# EAGLE board SparkFun_Ambient_Light_Sensor_VEML6030-Panel (EAGLE 9.4.0), part 1 of 4
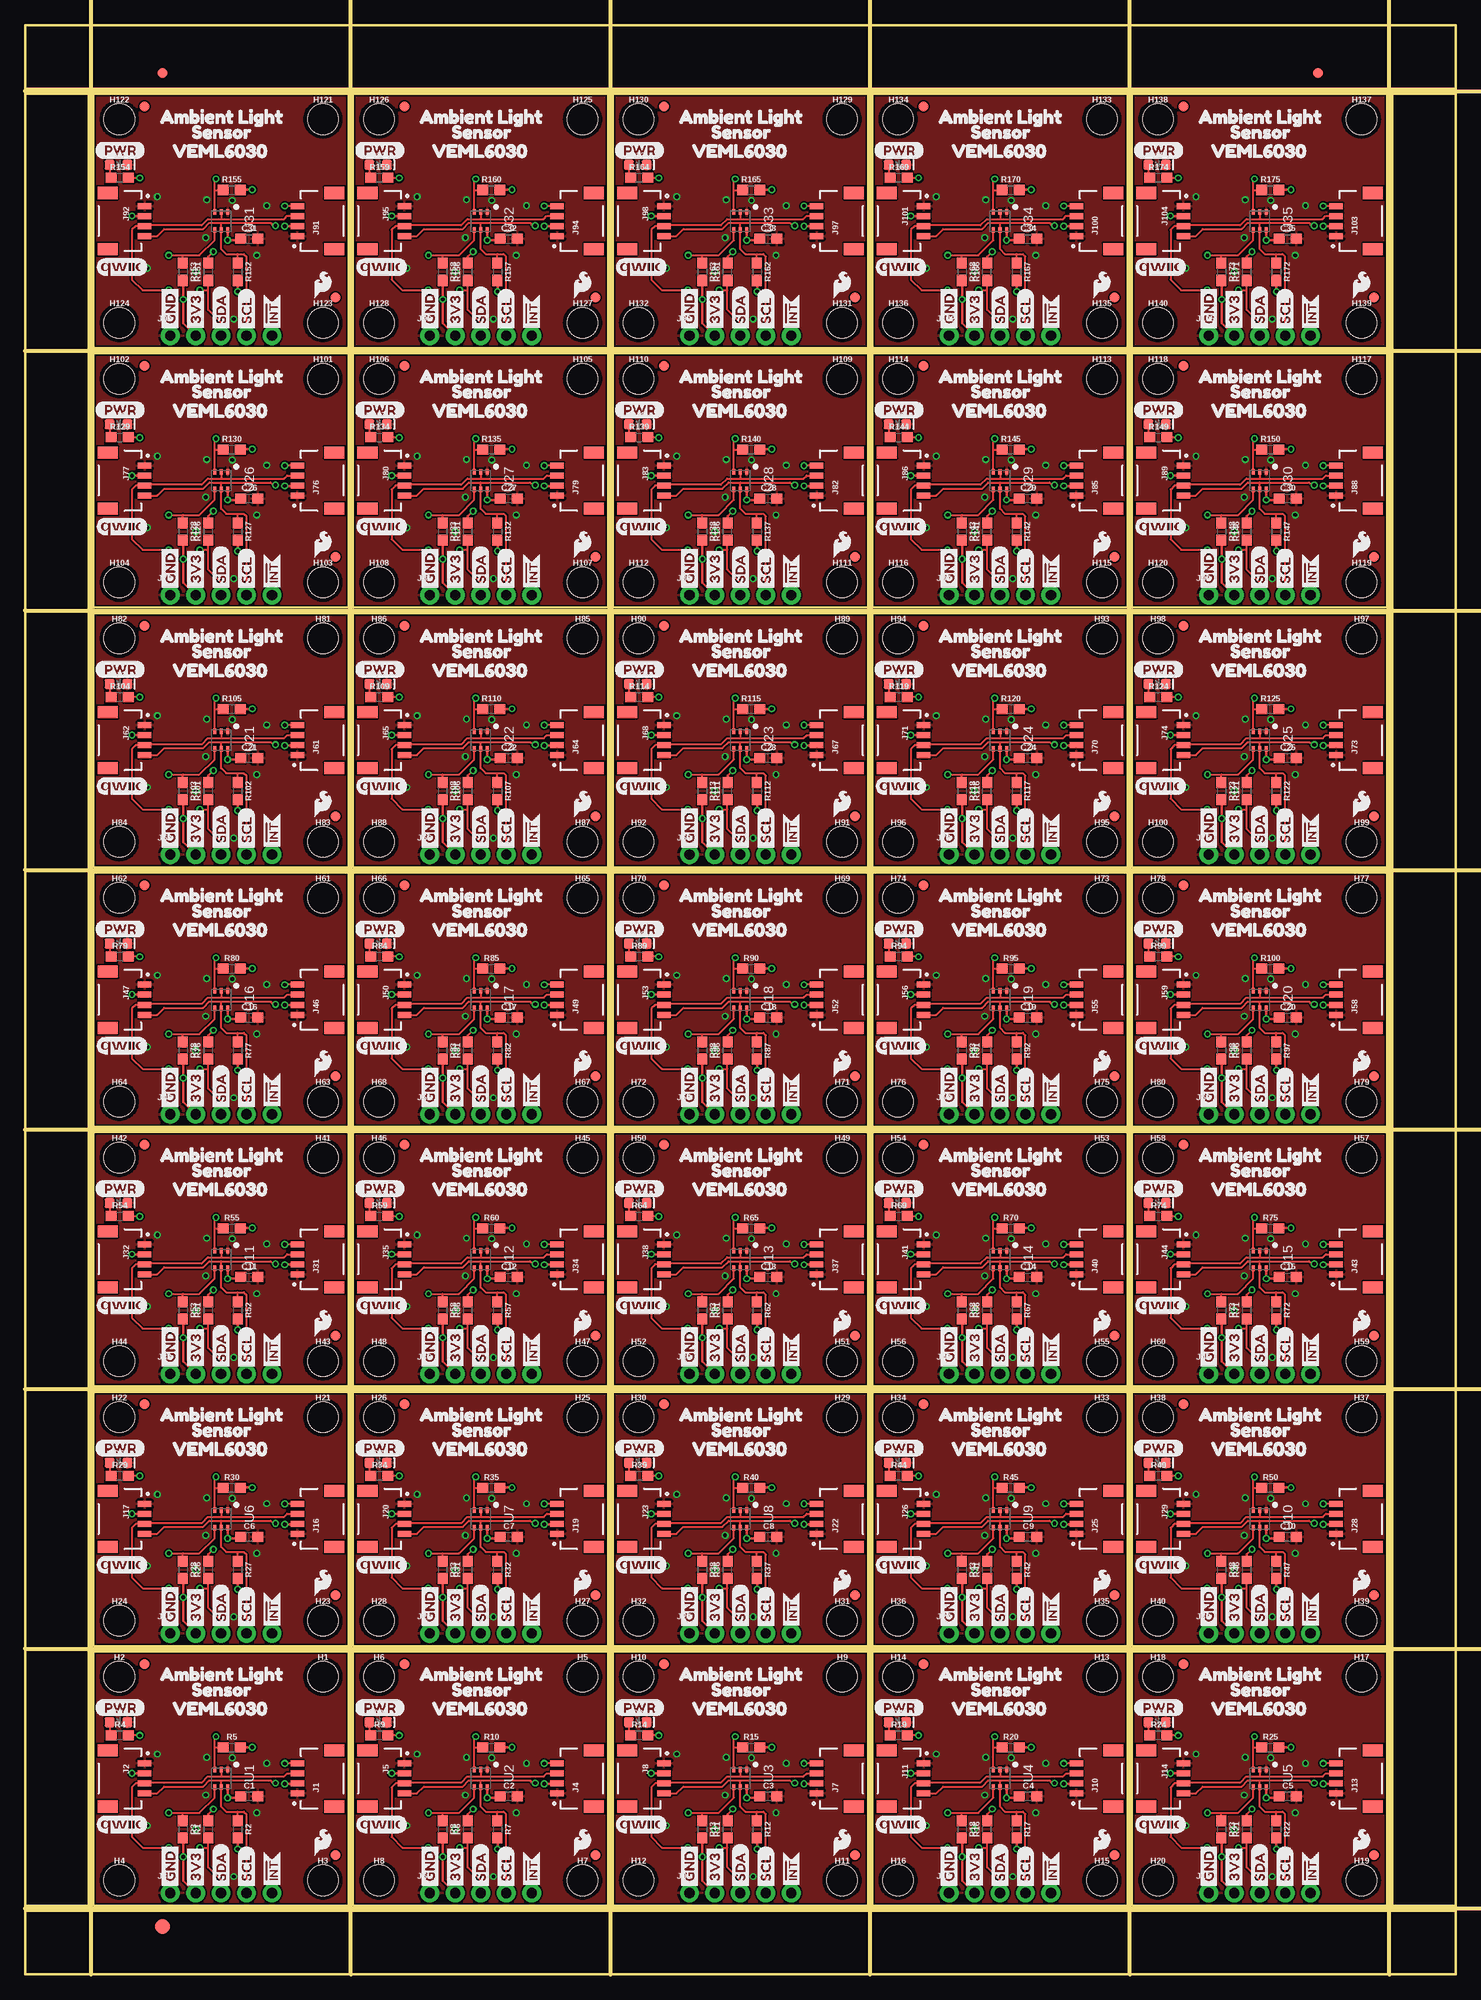
[diagram p0: board, top side]
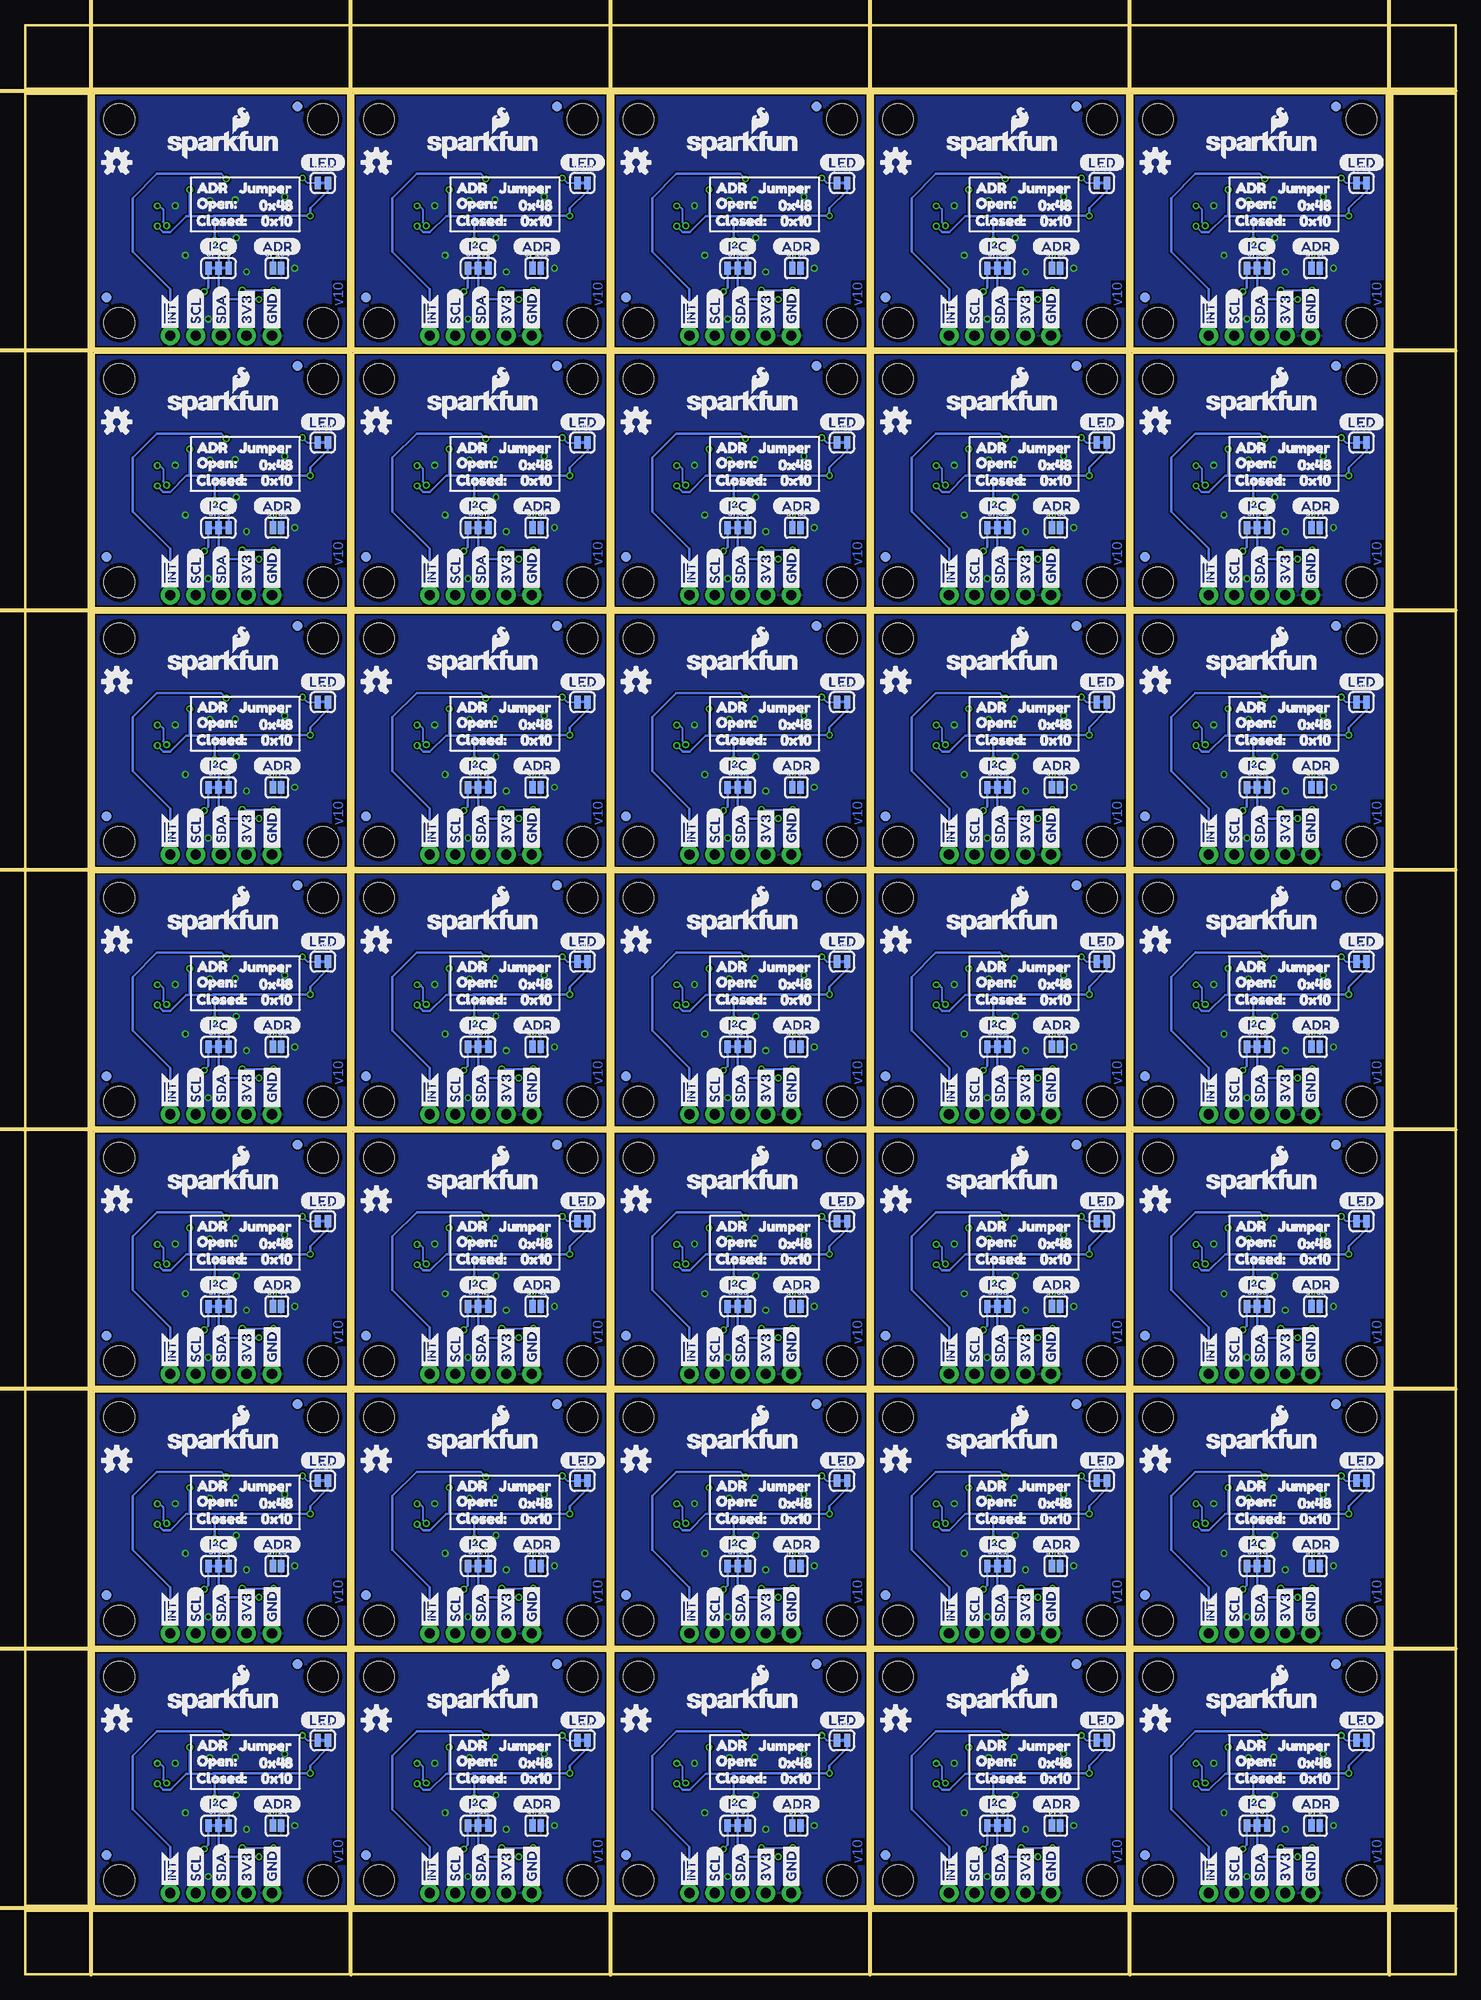
[diagram p1: board, bottom side, seen from below]

Size 142.75 x 194.56 mm. Coordinates in mm from the lower left corner, seen from the top.
Outline: 6.86,6.86 6.86,32.26 32.26,32.26 32.26,6.86 6.86,6.86
Outline: 32.77,6.86 32.77,32.26 58.17,32.26 58.17,6.86 32.77,6.86
Outline: 58.67,6.86 58.67,32.26 84.07,32.26 84.07,6.86 58.67,6.86
Outline: 84.58,6.86 84.58,32.26 109.98,32.26 109.98,6.86 84.58,6.86
Outline: 110.49,6.86 110.49,32.26 135.89,32.26 135.89,6.86 110.49,6.86
Outline: 6.86,32.77 6.86,58.17 32.26,58.17 32.26,32.77 6.86,32.77
Outline: 32.77,32.77 32.77,58.17 58.17,58.17 58.17,32.77 32.77,32.77
Outline: 58.67,32.77 58.67,58.17 84.07,58.17 84.07,32.77 58.67,32.77
Outline: 84.58,32.77 84.58,58.17 109.98,58.17 109.98,32.77 84.58,32.77
Outline: 110.49,32.77 110.49,58.17 135.89,58.17 135.89,32.77 110.49,32.77
Outline: 6.86,58.67 6.86,84.07 32.26,84.07 32.26,58.67 6.86,58.67
Outline: 32.77,58.67 32.77,84.07 58.17,84.07 58.17,58.67 32.77,58.67
Outline: 58.67,58.67 58.67,84.07 84.07,84.07 84.07,58.67 58.67,58.67
Outline: 84.58,58.67 84.58,84.07 109.98,84.07 109.98,58.67 84.58,58.67
Outline: 110.49,58.67 110.49,84.07 135.89,84.07 135.89,58.67 110.49,58.67
Outline: 6.86,84.58 6.86,109.98 32.26,109.98 32.26,84.58 6.86,84.58
Outline: 32.77,84.58 32.77,109.98 58.17,109.98 58.17,84.58 32.77,84.58
Outline: 58.67,84.58 58.67,109.98 84.07,109.98 84.07,84.58 58.67,84.58
Outline: 84.58,84.58 84.58,109.98 109.98,109.98 109.98,84.58 84.58,84.58
Outline: 110.49,84.58 110.49,109.98 135.89,109.98 135.89,84.58 110.49,84.58
Outline: 6.86,110.49 6.86,135.89 32.26,135.89 32.26,110.49 6.86,110.49
Outline: 32.77,110.49 32.77,135.89 58.17,135.89 58.17,110.49 32.77,110.49
Outline: 58.67,110.49 58.67,135.89 84.07,135.89 84.07,110.49 58.67,110.49
Outline: 84.58,110.49 84.58,135.89 109.98,135.89 109.98,110.49 84.58,110.49
Outline: 110.49,110.49 110.49,135.89 135.89,135.89 135.89,110.49 110.49,110.49
Outline: 6.86,136.4 6.86,161.8 32.26,161.8 32.26,136.4 6.86,136.4
Outline: 32.77,136.4 32.77,161.8 58.17,161.8 58.17,136.4 32.77,136.4
Outline: 58.67,136.4 58.67,161.8 84.07,161.8 84.07,136.4 58.67,136.4
Outline: 84.58,136.4 84.58,161.8 109.98,161.8 109.98,136.4 84.58,136.4
Outline: 110.49,136.4 110.49,161.8 135.89,161.8 135.89,136.4 110.49,136.4
Outline: 6.86,162.31 6.86,187.71 32.26,187.71 32.26,162.31 6.86,162.31
Outline: 32.77,162.31 32.77,187.71 58.17,187.71 58.17,162.31 32.77,162.31
Outline: 58.67,162.31 58.67,187.71 84.07,187.71 84.07,162.31 58.67,162.31
Outline: 84.58,162.31 84.58,187.71 109.98,187.71 109.98,162.31 84.58,162.31
Outline: 110.49,162.31 110.49,187.71 135.89,187.71 135.89,162.31 110.49,162.31
Outline: 0,6.35 142.75,6.35 142.75,0 0,0 0,6.35
Outline: 136.4,187.71 142.75,187.71 142.75,6.86 136.4,6.86 136.4,187.71
Outline: 0,194.56 142.75,194.56 142.75,188.21 0,188.21 0,194.56
Outline: 0,187.71 6.35,187.71 6.35,6.86 0,6.86 0,187.71
Copper layers (1*16): Top 0.035mm / dielectric 1.5mm / Bottom 0.035mm
Design rules "SparkFun-2-layer-PCBWay-LIMIT": minimum track width 6mil, minimum drill 0.3mm, track to track 6mil, track to pad 6mil, pad to pad 6mil, via to via 6mil, smd to smd 6mil, copper to edge 6mil, drill to drill 6mil, minimum pad ring 6mil, minimum via ring 6mil, stop-mask expansion 4mil, vias tented up to drill 25mil, thermal gap 10mil
Milling: 14 lines

## Footprints (pad centres in the part's own frame; a part is rotated, then mirrored left to right if it is on the bottom)
0603 = smd 1.1 x 1: 1 -0.85,0; 2 0.85,0
LED-0603 = smd 1 x 1: A -0.877,0; C 0.877,0
FIDUCIAL-1X2 = smd 1 x 1: 1 0,0
FIDUCIAL-1.5X3 = smd 1.5 x 1.5: 1 0,0
STAND-OFF-TIGHT = hole 3.048: 0,0
JST04_1MM_RA = smd 0.6 x 1.35: 1 -1.5,0; 2 -0.5,0; 3 0.5,0; 4 1.5,0 | smd 1.2 x 2: NC1 2.8,-3.675; NC2 -2.8,-3.675
1X05_NO_SILK = drill 1.016 pad 1.88: 1 0,0; 2 2.54,0; 3 5.08,0; 4 7.62,0; 5 10.16,0
SMT-JUMPER_2_NC_TRACE_SILK = smd 0.635 x 1.27: 1 -0.508,0; 2 0.508,0
SMT-JUMPER_2_NO_SILK = smd 0.635 x 1.27: 1 -0.406,0; 2 0.406,0
SMT-JUMPER_3_2-NC_TRACE_SILK = smd 0.635 x 1.27: 1 -1.016,0; 2 0,0; 3 1.016,0
VEML6030 = smd 0.55 x 0.3: P1 -0.88,0.65; P2 -0.88,0; P3 -0.88,-0.65; P4 0.87,-0.65; P5 0.87,0; P6 0.87,0.65

## Placement (x,y rotation side)
C1  0.1uF  [0603]  22.35,17.78 0 top
C2  0.1uF  [0603]  48.26,17.78 0 top
C3  0.1uF  [0603]  74.17,17.78 0 top
C4  0.1uF  [0603]  100.08,17.78 0 top
C5  0.1uF  [0603]  125.98,17.78 0 top
C6  0.1uF  [0603]  22.35,43.69 0 top
C7  0.1uF  [0603]  48.26,43.69 0 top
C8  0.1uF  [0603]  74.17,43.69 0 top
C9  0.1uF  [0603]  100.08,43.69 0 top
C10  0.1uF  [0603]  125.98,43.69 0 top
C11  0.1uF  [0603]  22.35,69.6 0 top
C12  0.1uF  [0603]  48.26,69.6 0 top
C13  0.1uF  [0603]  74.17,69.6 0 top
C14  0.1uF  [0603]  100.08,69.6 0 top
C15  0.1uF  [0603]  125.98,69.6 0 top
C16  0.1uF  [0603]  22.35,95.5 0 top
C17  0.1uF  [0603]  48.26,95.5 0 top
C18  0.1uF  [0603]  74.17,95.5 0 top
C19  0.1uF  [0603]  100.08,95.5 0 top
C20  0.1uF  [0603]  125.98,95.5 0 top
C21  0.1uF  [0603]  22.35,121.41 0 top
C22  0.1uF  [0603]  48.26,121.41 0 top
C23  0.1uF  [0603]  74.17,121.41 0 top
C24  0.1uF  [0603]  100.08,121.41 0 top
C25  0.1uF  [0603]  125.98,121.41 0 top
C26  0.1uF  [0603]  22.35,147.32 0 top
C27  0.1uF  [0603]  48.26,147.32 0 top
C28  0.1uF  [0603]  74.17,147.32 0 top
C29  0.1uF  [0603]  100.08,147.32 0 top
C30  0.1uF  [0603]  125.98,147.32 0 top
C31  0.1uF  [0603]  22.35,173.23 0 top
C32  0.1uF  [0603]  48.26,173.23 0 top
C33  0.1uF  [0603]  74.17,173.23 0 top
C34  0.1uF  [0603]  100.08,173.23 0 top
C35  0.1uF  [0603]  125.98,173.23 0 top
D1  RED  [LED-0603]  9.32,25.17 0 top
D2  RED  [LED-0603]  35.23,25.17 0 top
D3  RED  [LED-0603]  61.14,25.17 0 top
D4  RED  [LED-0603]  87.05,25.17 0 top
D5  RED  [LED-0603]  112.95,25.17 0 top
D6  RED  [LED-0603]  9.32,51.08 0 top
D7  RED  [LED-0603]  35.23,51.08 0 top
D8  RED  [LED-0603]  61.14,51.08 0 top
D9  RED  [LED-0603]  87.05,51.08 0 top
D10  RED  [LED-0603]  112.95,51.08 0 top
D11  RED  [LED-0603]  9.32,76.99 0 top
D12  RED  [LED-0603]  35.23,76.99 0 top
D13  RED  [LED-0603]  61.14,76.99 0 top
D14  RED  [LED-0603]  87.05,76.99 0 top
D15  RED  [LED-0603]  112.95,76.99 0 top
D16  RED  [LED-0603]  9.32,102.9 0 top
D17  RED  [LED-0603]  35.23,102.9 0 top
D18  RED  [LED-0603]  61.14,102.9 0 top
D19  RED  [LED-0603]  87.05,102.9 0 top
D20  RED  [LED-0603]  112.95,102.9 0 top
D21  RED  [LED-0603]  9.32,128.8 0 top
D22  RED  [LED-0603]  35.23,128.8 0 top
D23  RED  [LED-0603]  61.14,128.8 0 top
D24  RED  [LED-0603]  87.05,128.8 0 top
D25  RED  [LED-0603]  112.95,128.8 0 top
D26  RED  [LED-0603]  9.32,154.71 0 top
D27  RED  [LED-0603]  35.23,154.71 0 top
D28  RED  [LED-0603]  61.14,154.71 0 top
D29  RED  [LED-0603]  87.05,154.71 0 top
D30  RED  [LED-0603]  112.95,154.71 0 top
D31  RED  [LED-0603]  9.32,180.62 0 top
D32  RED  [LED-0603]  35.23,180.62 0 top
D33  RED  [LED-0603]  61.14,180.62 0 top
D34  RED  [LED-0603]  87.05,180.62 0 top
D35  RED  [LED-0603]  112.95,180.62 0 top
E$1  [FIDUCIAL-1X2]  13.72,189.8 0 top
E$2  [FIDUCIAL-1X2]  129.03,189.8 0 top
E$3  [FIDUCIAL-1.5X3]  13.72,4.76 0 top
FD1  FIDUCIAL1X2  [FIDUCIAL-1X2]  30.99,11.94 0 bottom
FD2  FIDUCIAL1X2  [FIDUCIAL-1X2]  11.94,30.99 0 bottom
FD3  FIDUCIAL1X2  [FIDUCIAL-1X2]  11.94,30.99 0 top
FD4  FIDUCIAL1X2  [FIDUCIAL-1X2]  30.99,11.94 0 top
FD5  FIDUCIAL1X2  [FIDUCIAL-1X2]  56.9,11.94 0 bottom
FD6  FIDUCIAL1X2  [FIDUCIAL-1X2]  37.85,30.99 0 bottom
FD7  FIDUCIAL1X2  [FIDUCIAL-1X2]  37.85,30.99 0 top
FD8  FIDUCIAL1X2  [FIDUCIAL-1X2]  56.9,11.94 0 top
FD9  FIDUCIAL1X2  [FIDUCIAL-1X2]  82.8,11.94 0 bottom
FD10  FIDUCIAL1X2  [FIDUCIAL-1X2]  63.75,30.99 0 bottom
FD11  FIDUCIAL1X2  [FIDUCIAL-1X2]  63.75,30.99 0 top
FD12  FIDUCIAL1X2  [FIDUCIAL-1X2]  82.8,11.94 0 top
FD13  FIDUCIAL1X2  [FIDUCIAL-1X2]  108.71,11.94 0 bottom
FD14  FIDUCIAL1X2  [FIDUCIAL-1X2]  89.66,30.99 0 bottom
FD15  FIDUCIAL1X2  [FIDUCIAL-1X2]  89.66,30.99 0 top
FD16  FIDUCIAL1X2  [FIDUCIAL-1X2]  108.71,11.94 0 top
FD17  FIDUCIAL1X2  [FIDUCIAL-1X2]  134.62,11.94 0 bottom
FD18  FIDUCIAL1X2  [FIDUCIAL-1X2]  115.57,30.99 0 bottom
FD19  FIDUCIAL1X2  [FIDUCIAL-1X2]  115.57,30.99 0 top
FD20  FIDUCIAL1X2  [FIDUCIAL-1X2]  134.62,11.94 0 top
FD21  FIDUCIAL1X2  [FIDUCIAL-1X2]  30.99,37.85 0 bottom
FD22  FIDUCIAL1X2  [FIDUCIAL-1X2]  11.94,56.9 0 bottom
FD23  FIDUCIAL1X2  [FIDUCIAL-1X2]  11.94,56.9 0 top
FD24  FIDUCIAL1X2  [FIDUCIAL-1X2]  30.99,37.85 0 top
FD25  FIDUCIAL1X2  [FIDUCIAL-1X2]  56.9,37.85 0 bottom
FD26  FIDUCIAL1X2  [FIDUCIAL-1X2]  37.85,56.9 0 bottom
FD27  FIDUCIAL1X2  [FIDUCIAL-1X2]  37.85,56.9 0 top
FD28  FIDUCIAL1X2  [FIDUCIAL-1X2]  56.9,37.85 0 top
FD29  FIDUCIAL1X2  [FIDUCIAL-1X2]  82.8,37.85 0 bottom
FD30  FIDUCIAL1X2  [FIDUCIAL-1X2]  63.75,56.9 0 bottom
FD31  FIDUCIAL1X2  [FIDUCIAL-1X2]  63.75,56.9 0 top
FD32  FIDUCIAL1X2  [FIDUCIAL-1X2]  82.8,37.85 0 top
FD33  FIDUCIAL1X2  [FIDUCIAL-1X2]  108.71,37.85 0 bottom
FD34  FIDUCIAL1X2  [FIDUCIAL-1X2]  89.66,56.9 0 bottom
FD35  FIDUCIAL1X2  [FIDUCIAL-1X2]  89.66,56.9 0 top
FD36  FIDUCIAL1X2  [FIDUCIAL-1X2]  108.71,37.85 0 top
FD37  FIDUCIAL1X2  [FIDUCIAL-1X2]  134.62,37.85 0 bottom
FD38  FIDUCIAL1X2  [FIDUCIAL-1X2]  115.57,56.9 0 bottom
FD39  FIDUCIAL1X2  [FIDUCIAL-1X2]  115.57,56.9 0 top
FD40  FIDUCIAL1X2  [FIDUCIAL-1X2]  134.62,37.85 0 top
FD41  FIDUCIAL1X2  [FIDUCIAL-1X2]  30.99,63.75 0 bottom
FD42  FIDUCIAL1X2  [FIDUCIAL-1X2]  11.94,82.8 0 bottom
FD43  FIDUCIAL1X2  [FIDUCIAL-1X2]  11.94,82.8 0 top
FD44  FIDUCIAL1X2  [FIDUCIAL-1X2]  30.99,63.75 0 top
FD45  FIDUCIAL1X2  [FIDUCIAL-1X2]  56.9,63.75 0 bottom
FD46  FIDUCIAL1X2  [FIDUCIAL-1X2]  37.85,82.8 0 bottom
FD47  FIDUCIAL1X2  [FIDUCIAL-1X2]  37.85,82.8 0 top
FD48  FIDUCIAL1X2  [FIDUCIAL-1X2]  56.9,63.75 0 top
FD49  FIDUCIAL1X2  [FIDUCIAL-1X2]  82.8,63.75 0 bottom
FD50  FIDUCIAL1X2  [FIDUCIAL-1X2]  63.75,82.8 0 bottom
FD51  FIDUCIAL1X2  [FIDUCIAL-1X2]  63.75,82.8 0 top
FD52  FIDUCIAL1X2  [FIDUCIAL-1X2]  82.8,63.75 0 top
FD53  FIDUCIAL1X2  [FIDUCIAL-1X2]  108.71,63.75 0 bottom
FD54  FIDUCIAL1X2  [FIDUCIAL-1X2]  89.66,82.8 0 bottom
FD55  FIDUCIAL1X2  [FIDUCIAL-1X2]  89.66,82.8 0 top
FD56  FIDUCIAL1X2  [FIDUCIAL-1X2]  108.71,63.75 0 top
FD57  FIDUCIAL1X2  [FIDUCIAL-1X2]  134.62,63.75 0 bottom
FD58  FIDUCIAL1X2  [FIDUCIAL-1X2]  115.57,82.8 0 bottom
FD59  FIDUCIAL1X2  [FIDUCIAL-1X2]  115.57,82.8 0 top
FD60  FIDUCIAL1X2  [FIDUCIAL-1X2]  134.62,63.75 0 top
FD61  FIDUCIAL1X2  [FIDUCIAL-1X2]  30.99,89.66 0 bottom
FD62  FIDUCIAL1X2  [FIDUCIAL-1X2]  11.94,108.71 0 bottom
FD63  FIDUCIAL1X2  [FIDUCIAL-1X2]  11.94,108.71 0 top
FD64  FIDUCIAL1X2  [FIDUCIAL-1X2]  30.99,89.66 0 top
FD65  FIDUCIAL1X2  [FIDUCIAL-1X2]  56.9,89.66 0 bottom
FD66  FIDUCIAL1X2  [FIDUCIAL-1X2]  37.85,108.71 0 bottom
FD67  FIDUCIAL1X2  [FIDUCIAL-1X2]  37.85,108.71 0 top
FD68  FIDUCIAL1X2  [FIDUCIAL-1X2]  56.9,89.66 0 top
FD69  FIDUCIAL1X2  [FIDUCIAL-1X2]  82.8,89.66 0 bottom
FD70  FIDUCIAL1X2  [FIDUCIAL-1X2]  63.75,108.71 0 bottom
FD71  FIDUCIAL1X2  [FIDUCIAL-1X2]  63.75,108.71 0 top
FD72  FIDUCIAL1X2  [FIDUCIAL-1X2]  82.8,89.66 0 top
FD73  FIDUCIAL1X2  [FIDUCIAL-1X2]  108.71,89.66 0 bottom
FD74  FIDUCIAL1X2  [FIDUCIAL-1X2]  89.66,108.71 0 bottom
FD75  FIDUCIAL1X2  [FIDUCIAL-1X2]  89.66,108.71 0 top
FD76  FIDUCIAL1X2  [FIDUCIAL-1X2]  108.71,89.66 0 top
FD77  FIDUCIAL1X2  [FIDUCIAL-1X2]  134.62,89.66 0 bottom
FD78  FIDUCIAL1X2  [FIDUCIAL-1X2]  115.57,108.71 0 bottom
FD79  FIDUCIAL1X2  [FIDUCIAL-1X2]  115.57,108.71 0 top
FD80  FIDUCIAL1X2  [FIDUCIAL-1X2]  134.62,89.66 0 top
FD81  FIDUCIAL1X2  [FIDUCIAL-1X2]  30.99,115.57 0 bottom
FD82  FIDUCIAL1X2  [FIDUCIAL-1X2]  11.94,134.62 0 bottom
FD83  FIDUCIAL1X2  [FIDUCIAL-1X2]  11.94,134.62 0 top
FD84  FIDUCIAL1X2  [FIDUCIAL-1X2]  30.99,115.57 0 top
FD85  FIDUCIAL1X2  [FIDUCIAL-1X2]  56.9,115.57 0 bottom
FD86  FIDUCIAL1X2  [FIDUCIAL-1X2]  37.85,134.62 0 bottom
FD87  FIDUCIAL1X2  [FIDUCIAL-1X2]  37.85,134.62 0 top
FD88  FIDUCIAL1X2  [FIDUCIAL-1X2]  56.9,115.57 0 top
FD89  FIDUCIAL1X2  [FIDUCIAL-1X2]  82.8,115.57 0 bottom
FD90  FIDUCIAL1X2  [FIDUCIAL-1X2]  63.75,134.62 0 bottom
FD91  FIDUCIAL1X2  [FIDUCIAL-1X2]  63.75,134.62 0 top
FD92  FIDUCIAL1X2  [FIDUCIAL-1X2]  82.8,115.57 0 top
FD93  FIDUCIAL1X2  [FIDUCIAL-1X2]  108.71,115.57 0 bottom
FD94  FIDUCIAL1X2  [FIDUCIAL-1X2]  89.66,134.62 0 bottom
FD95  FIDUCIAL1X2  [FIDUCIAL-1X2]  89.66,134.62 0 top
FD96  FIDUCIAL1X2  [FIDUCIAL-1X2]  108.71,115.57 0 top
FD97  FIDUCIAL1X2  [FIDUCIAL-1X2]  134.62,115.57 0 bottom
FD98  FIDUCIAL1X2  [FIDUCIAL-1X2]  115.57,134.62 0 bottom
FD99  FIDUCIAL1X2  [FIDUCIAL-1X2]  115.57,134.62 0 top
FD100  FIDUCIAL1X2  [FIDUCIAL-1X2]  134.62,115.57 0 top
FD101  FIDUCIAL1X2  [FIDUCIAL-1X2]  30.99,141.48 0 bottom
FD102  FIDUCIAL1X2  [FIDUCIAL-1X2]  11.94,160.53 0 bottom
FD103  FIDUCIAL1X2  [FIDUCIAL-1X2]  11.94,160.53 0 top
FD104  FIDUCIAL1X2  [FIDUCIAL-1X2]  30.99,141.48 0 top
FD105  FIDUCIAL1X2  [FIDUCIAL-1X2]  56.9,141.48 0 bottom
FD106  FIDUCIAL1X2  [FIDUCIAL-1X2]  37.85,160.53 0 bottom
FD107  FIDUCIAL1X2  [FIDUCIAL-1X2]  37.85,160.53 0 top
FD108  FIDUCIAL1X2  [FIDUCIAL-1X2]  56.9,141.48 0 top
FD109  FIDUCIAL1X2  [FIDUCIAL-1X2]  82.8,141.48 0 bottom
FD110  FIDUCIAL1X2  [FIDUCIAL-1X2]  63.75,160.53 0 bottom
FD111  FIDUCIAL1X2  [FIDUCIAL-1X2]  63.75,160.53 0 top
FD112  FIDUCIAL1X2  [FIDUCIAL-1X2]  82.8,141.48 0 top
FD113  FIDUCIAL1X2  [FIDUCIAL-1X2]  108.71,141.48 0 bottom
FD114  FIDUCIAL1X2  [FIDUCIAL-1X2]  89.66,160.53 0 bottom
FD115  FIDUCIAL1X2  [FIDUCIAL-1X2]  89.66,160.53 0 top
FD116  FIDUCIAL1X2  [FIDUCIAL-1X2]  108.71,141.48 0 top
FD117  FIDUCIAL1X2  [FIDUCIAL-1X2]  134.62,141.48 0 bottom
FD118  FIDUCIAL1X2  [FIDUCIAL-1X2]  115.57,160.53 0 bottom
FD119  FIDUCIAL1X2  [FIDUCIAL-1X2]  115.57,160.53 0 top
FD120  FIDUCIAL1X2  [FIDUCIAL-1X2]  134.62,141.48 0 top
FD121  FIDUCIAL1X2  [FIDUCIAL-1X2]  30.99,167.39 0 bottom
FD122  FIDUCIAL1X2  [FIDUCIAL-1X2]  11.94,186.44 0 bottom
FD123  FIDUCIAL1X2  [FIDUCIAL-1X2]  11.94,186.44 0 top
FD124  FIDUCIAL1X2  [FIDUCIAL-1X2]  30.99,167.39 0 top
FD125  FIDUCIAL1X2  [FIDUCIAL-1X2]  56.9,167.39 0 bottom
FD126  FIDUCIAL1X2  [FIDUCIAL-1X2]  37.85,186.44 0 bottom
FD127  FIDUCIAL1X2  [FIDUCIAL-1X2]  37.85,186.44 0 top
FD128  FIDUCIAL1X2  [FIDUCIAL-1X2]  56.9,167.39 0 top
FD129  FIDUCIAL1X2  [FIDUCIAL-1X2]  82.8,167.39 0 bottom
FD130  FIDUCIAL1X2  [FIDUCIAL-1X2]  63.75,186.44 0 bottom
FD131  FIDUCIAL1X2  [FIDUCIAL-1X2]  63.75,186.44 0 top
FD132  FIDUCIAL1X2  [FIDUCIAL-1X2]  82.8,167.39 0 top
FD133  FIDUCIAL1X2  [FIDUCIAL-1X2]  108.71,167.39 0 bottom
FD134  FIDUCIAL1X2  [FIDUCIAL-1X2]  89.66,186.44 0 bottom
FD135  FIDUCIAL1X2  [FIDUCIAL-1X2]  89.66,186.44 0 top
FD136  FIDUCIAL1X2  [FIDUCIAL-1X2]  108.71,167.39 0 top
FD137  FIDUCIAL1X2  [FIDUCIAL-1X2]  134.62,167.39 0 bottom
FD138  FIDUCIAL1X2  [FIDUCIAL-1X2]  115.57,186.44 0 bottom
FD139  FIDUCIAL1X2  [FIDUCIAL-1X2]  115.57,186.44 0 top
FD140  FIDUCIAL1X2  [FIDUCIAL-1X2]  134.62,167.39 0 top
H1  STAND-OFFTIGHT  [STAND-OFF-TIGHT]  29.72,29.72 0 top
H2  STAND-OFFTIGHT  [STAND-OFF-TIGHT]  9.4,29.72 0 top
H3  STAND-OFFTIGHT  [STAND-OFF-TIGHT]  29.72,9.4 0 top
H4  STAND-OFFTIGHT  [STAND-OFF-TIGHT]  9.4,9.4 0 top
H5  STAND-OFFTIGHT  [STAND-OFF-TIGHT]  55.63,29.72 0 top
H6  STAND-OFFTIGHT  [STAND-OFF-TIGHT]  35.31,29.72 0 top
H7  STAND-OFFTIGHT  [STAND-OFF-TIGHT]  55.63,9.4 0 top
H8  STAND-OFFTIGHT  [STAND-OFF-TIGHT]  35.31,9.4 0 top
H9  STAND-OFFTIGHT  [STAND-OFF-TIGHT]  81.53,29.72 0 top
H10  STAND-OFFTIGHT  [STAND-OFF-TIGHT]  61.21,29.72 0 top
H11  STAND-OFFTIGHT  [STAND-OFF-TIGHT]  81.53,9.4 0 top
H12  STAND-OFFTIGHT  [STAND-OFF-TIGHT]  61.21,9.4 0 top
H13  STAND-OFFTIGHT  [STAND-OFF-TIGHT]  107.44,29.72 0 top
H14  STAND-OFFTIGHT  [STAND-OFF-TIGHT]  87.12,29.72 0 top
H15  STAND-OFFTIGHT  [STAND-OFF-TIGHT]  107.44,9.4 0 top
H16  STAND-OFFTIGHT  [STAND-OFF-TIGHT]  87.12,9.4 0 top
H17  STAND-OFFTIGHT  [STAND-OFF-TIGHT]  133.35,29.72 0 top
H18  STAND-OFFTIGHT  [STAND-OFF-TIGHT]  113.03,29.72 0 top
H19  STAND-OFFTIGHT  [STAND-OFF-TIGHT]  133.35,9.4 0 top
H20  STAND-OFFTIGHT  [STAND-OFF-TIGHT]  113.03,9.4 0 top
H21  STAND-OFFTIGHT  [STAND-OFF-TIGHT]  29.72,55.63 0 top
H22  STAND-OFFTIGHT  [STAND-OFF-TIGHT]  9.4,55.63 0 top
H23  STAND-OFFTIGHT  [STAND-OFF-TIGHT]  29.72,35.31 0 top
H24  STAND-OFFTIGHT  [STAND-OFF-TIGHT]  9.4,35.31 0 top
H25  STAND-OFFTIGHT  [STAND-OFF-TIGHT]  55.63,55.63 0 top
H26  STAND-OFFTIGHT  [STAND-OFF-TIGHT]  35.31,55.63 0 top
H27  STAND-OFFTIGHT  [STAND-OFF-TIGHT]  55.63,35.31 0 top
H28  STAND-OFFTIGHT  [STAND-OFF-TIGHT]  35.31,35.31 0 top
H29  STAND-OFFTIGHT  [STAND-OFF-TIGHT]  81.53,55.63 0 top
H30  STAND-OFFTIGHT  [STAND-OFF-TIGHT]  61.21,55.63 0 top
H31  STAND-OFFTIGHT  [STAND-OFF-TIGHT]  81.53,35.31 0 top
H32  STAND-OFFTIGHT  [STAND-OFF-TIGHT]  61.21,35.31 0 top
H33  STAND-OFFTIGHT  [STAND-OFF-TIGHT]  107.44,55.63 0 top
H34  STAND-OFFTIGHT  [STAND-OFF-TIGHT]  87.12,55.63 0 top
H35  STAND-OFFTIGHT  [STAND-OFF-TIGHT]  107.44,35.31 0 top
H36  STAND-OFFTIGHT  [STAND-OFF-TIGHT]  87.12,35.31 0 top
H37  STAND-OFFTIGHT  [STAND-OFF-TIGHT]  133.35,55.63 0 top
H38  STAND-OFFTIGHT  [STAND-OFF-TIGHT]  113.03,55.63 0 top
H39  STAND-OFFTIGHT  [STAND-OFF-TIGHT]  133.35,35.31 0 top
H40  STAND-OFFTIGHT  [STAND-OFF-TIGHT]  113.03,35.31 0 top
H41  STAND-OFFTIGHT  [STAND-OFF-TIGHT]  29.72,81.53 0 top
H42  STAND-OFFTIGHT  [STAND-OFF-TIGHT]  9.4,81.53 0 top
H43  STAND-OFFTIGHT  [STAND-OFF-TIGHT]  29.72,61.21 0 top
H44  STAND-OFFTIGHT  [STAND-OFF-TIGHT]  9.4,61.21 0 top
H45  STAND-OFFTIGHT  [STAND-OFF-TIGHT]  55.63,81.53 0 top
H46  STAND-OFFTIGHT  [STAND-OFF-TIGHT]  35.31,81.53 0 top
H47  STAND-OFFTIGHT  [STAND-OFF-TIGHT]  55.63,61.21 0 top
H48  STAND-OFFTIGHT  [STAND-OFF-TIGHT]  35.31,61.21 0 top
H49  STAND-OFFTIGHT  [STAND-OFF-TIGHT]  81.53,81.53 0 top
H50  STAND-OFFTIGHT  [STAND-OFF-TIGHT]  61.21,81.53 0 top
H51  STAND-OFFTIGHT  [STAND-OFF-TIGHT]  81.53,61.21 0 top
H52  STAND-OFFTIGHT  [STAND-OFF-TIGHT]  61.21,61.21 0 top
H53  STAND-OFFTIGHT  [STAND-OFF-TIGHT]  107.44,81.53 0 top
H54  STAND-OFFTIGHT  [STAND-OFF-TIGHT]  87.12,81.53 0 top
H55  STAND-OFFTIGHT  [STAND-OFF-TIGHT]  107.44,61.21 0 top
H56  STAND-OFFTIGHT  [STAND-OFF-TIGHT]  87.12,61.21 0 top
H57  STAND-OFFTIGHT  [STAND-OFF-TIGHT]  133.35,81.53 0 top
H58  STAND-OFFTIGHT  [STAND-OFF-TIGHT]  113.03,81.53 0 top
H59  STAND-OFFTIGHT  [STAND-OFF-TIGHT]  133.35,61.21 0 top
H60  STAND-OFFTIGHT  [STAND-OFF-TIGHT]  113.03,61.21 0 top
H61  STAND-OFFTIGHT  [STAND-OFF-TIGHT]  29.72,107.44 0 top
H62  STAND-OFFTIGHT  [STAND-OFF-TIGHT]  9.4,107.44 0 top
H63  STAND-OFFTIGHT  [STAND-OFF-TIGHT]  29.72,87.12 0 top
H64  STAND-OFFTIGHT  [STAND-OFF-TIGHT]  9.4,87.12 0 top
H65  STAND-OFFTIGHT  [STAND-OFF-TIGHT]  55.63,107.44 0 top
H66  STAND-OFFTIGHT  [STAND-OFF-TIGHT]  35.31,107.44 0 top
H67  STAND-OFFTIGHT  [STAND-OFF-TIGHT]  55.63,87.12 0 top
H68  STAND-OFFTIGHT  [STAND-OFF-TIGHT]  35.31,87.12 0 top
H69  STAND-OFFTIGHT  [STAND-OFF-TIGHT]  81.53,107.44 0 top
H70  STAND-OFFTIGHT  [STAND-OFF-TIGHT]  61.21,107.44 0 top
H71  STAND-OFFTIGHT  [STAND-OFF-TIGHT]  81.53,87.12 0 top
H72  STAND-OFFTIGHT  [STAND-OFF-TIGHT]  61.21,87.12 0 top
H73  STAND-OFFTIGHT  [STAND-OFF-TIGHT]  107.44,107.44 0 top
H74  STAND-OFFTIGHT  [STAND-OFF-TIGHT]  87.12,107.44 0 top
H75  STAND-OFFTIGHT  [STAND-OFF-TIGHT]  107.44,87.12 0 top
H76  STAND-OFFTIGHT  [STAND-OFF-TIGHT]  87.12,87.12 0 top
H77  STAND-OFFTIGHT  [STAND-OFF-TIGHT]  133.35,107.44 0 top
H78  STAND-OFFTIGHT  [STAND-OFF-TIGHT]  113.03,107.44 0 top
H79  STAND-OFFTIGHT  [STAND-OFF-TIGHT]  133.35,87.12 0 top
H80  STAND-OFFTIGHT  [STAND-OFF-TIGHT]  113.03,87.12 0 top
H81  STAND-OFFTIGHT  [STAND-OFF-TIGHT]  29.72,133.35 0 top
H82  STAND-OFFTIGHT  [STAND-OFF-TIGHT]  9.4,133.35 0 top
H83  STAND-OFFTIGHT  [STAND-OFF-TIGHT]  29.72,113.03 0 top
H84  STAND-OFFTIGHT  [STAND-OFF-TIGHT]  9.4,113.03 0 top
H85  STAND-OFFTIGHT  [STAND-OFF-TIGHT]  55.63,133.35 0 top
H86  STAND-OFFTIGHT  [STAND-OFF-TIGHT]  35.31,133.35 0 top
H87  STAND-OFFTIGHT  [STAND-OFF-TIGHT]  55.63,113.03 0 top
H88  STAND-OFFTIGHT  [STAND-OFF-TIGHT]  35.31,113.03 0 top
H89  STAND-OFFTIGHT  [STAND-OFF-TIGHT]  81.53,133.35 0 top
H90  STAND-OFFTIGHT  [STAND-OFF-TIGHT]  61.21,133.35 0 top
H91  STAND-OFFTIGHT  [STAND-OFF-TIGHT]  81.53,113.03 0 top
H92  STAND-OFFTIGHT  [STAND-OFF-TIGHT]  61.21,113.03 0 top
H93  STAND-OFFTIGHT  [STAND-OFF-TIGHT]  107.44,133.35 0 top
H94  STAND-OFFTIGHT  [STAND-OFF-TIGHT]  87.12,133.35 0 top
H95  STAND-OFFTIGHT  [STAND-OFF-TIGHT]  107.44,113.03 0 top
H96  STAND-OFFTIGHT  [STAND-OFF-TIGHT]  87.12,113.03 0 top
H97  STAND-OFFTIGHT  [STAND-OFF-TIGHT]  133.35,133.35 0 top
H98  STAND-OFFTIGHT  [STAND-OFF-TIGHT]  113.03,133.35 0 top
H99  STAND-OFFTIGHT  [STAND-OFF-TIGHT]  133.35,113.03 0 top
H100  STAND-OFFTIGHT  [STAND-OFF-TIGHT]  113.03,113.03 0 top
H101  STAND-OFFTIGHT  [STAND-OFF-TIGHT]  29.72,159.26 0 top
H102  STAND-OFFTIGHT  [STAND-OFF-TIGHT]  9.4,159.26 0 top
H103  STAND-OFFTIGHT  [STAND-OFF-TIGHT]  29.72,138.94 0 top
H104  STAND-OFFTIGHT  [STAND-OFF-TIGHT]  9.4,138.94 0 top
H105  STAND-OFFTIGHT  [STAND-OFF-TIGHT]  55.63,159.26 0 top
H106  STAND-OFFTIGHT  [STAND-OFF-TIGHT]  35.31,159.26 0 top
H107  STAND-OFFTIGHT  [STAND-OFF-TIGHT]  55.63,138.94 0 top
H108  STAND-OFFTIGHT  [STAND-OFF-TIGHT]  35.31,138.94 0 top
H109  STAND-OFFTIGHT  [STAND-OFF-TIGHT]  81.53,159.26 0 top
H110  STAND-OFFTIGHT  [STAND-OFF-TIGHT]  61.21,159.26 0 top
H111  STAND-OFFTIGHT  [STAND-OFF-TIGHT]  81.53,138.94 0 top
H112  STAND-OFFTIGHT  [STAND-OFF-TIGHT]  61.21,138.94 0 top
H113  STAND-OFFTIGHT  [STAND-OFF-TIGHT]  107.44,159.26 0 top
H114  STAND-OFFTIGHT  [STAND-OFF-TIGHT]  87.12,159.26 0 top
H115  STAND-OFFTIGHT  [STAND-OFF-TIGHT]  107.44,138.94 0 top
H116  STAND-OFFTIGHT  [STAND-OFF-TIGHT]  87.12,138.94 0 top
H117  STAND-OFFTIGHT  [STAND-OFF-TIGHT]  133.35,159.26 0 top
H118  STAND-OFFTIGHT  [STAND-OFF-TIGHT]  113.03,159.26 0 top
H119  STAND-OFFTIGHT  [STAND-OFF-TIGHT]  133.35,138.94 0 top
H120  STAND-OFFTIGHT  [STAND-OFF-TIGHT]  113.03,138.94 0 top
H121  STAND-OFFTIGHT  [STAND-OFF-TIGHT]  29.72,185.17 0 top
H122  STAND-OFFTIGHT  [STAND-OFF-TIGHT]  9.4,185.17 0 top
H123  STAND-OFFTIGHT  [STAND-OFF-TIGHT]  29.72,164.85 0 top
H124  STAND-OFFTIGHT  [STAND-OFF-TIGHT]  9.4,164.85 0 top
H125  STAND-OFFTIGHT  [STAND-OFF-TIGHT]  55.63,185.17 0 top
H126  STAND-OFFTIGHT  [STAND-OFF-TIGHT]  35.31,185.17 0 top
H127  STAND-OFFTIGHT  [STAND-OFF-TIGHT]  55.63,164.85 0 top
H128  STAND-OFFTIGHT  [STAND-OFF-TIGHT]  35.31,164.85 0 top
H129  STAND-OFFTIGHT  [STAND-OFF-TIGHT]  81.53,185.17 0 top
H130  STAND-OFFTIGHT  [STAND-OFF-TIGHT]  61.21,185.17 0 top
H131  STAND-OFFTIGHT  [STAND-OFF-TIGHT]  81.53,164.85 0 top
H132  STAND-OFFTIGHT  [STAND-OFF-TIGHT]  61.21,164.85 0 top
H133  STAND-OFFTIGHT  [STAND-OFF-TIGHT]  107.44,185.17 0 top
H134  STAND-OFFTIGHT  [STAND-OFF-TIGHT]  87.12,185.17 0 top
H135  STAND-OFFTIGHT  [STAND-OFF-TIGHT]  107.44,164.85 0 top
H136  STAND-OFFTIGHT  [STAND-OFF-TIGHT]  87.12,164.85 0 top
H137  STAND-OFFTIGHT  [STAND-OFF-TIGHT]  133.35,185.17 0 top
H138  STAND-OFFTIGHT  [STAND-OFF-TIGHT]  113.03,185.17 0 top
H139  STAND-OFFTIGHT  [STAND-OFF-TIGHT]  133.35,164.85 0 top
H140  STAND-OFFTIGHT  [STAND-OFF-TIGHT]  113.03,164.85 0 top
J1  [JST04_1MM_RA]  27.18,19.56 90 top
J2  [JST04_1MM_RA]  11.94,19.56 270 top
J3  [1X05_NO_SILK]  14.48,8.13 0 top
J4  [JST04_1MM_RA]  53.09,19.56 90 top
J5  [JST04_1MM_RA]  37.85,19.56 270 top
J6  [1X05_NO_SILK]  40.39,8.13 0 top
J7  [JST04_1MM_RA]  78.99,19.56 90 top
J8  [JST04_1MM_RA]  63.75,19.56 270 top
J9  [1X05_NO_SILK]  66.29,8.13 0 top
J10  [JST04_1MM_RA]  104.9,19.56 90 top
J11  [JST04_1MM_RA]  89.66,19.56 270 top
J12  [1X05_NO_SILK]  92.2,8.13 0 top
J13  [JST04_1MM_RA]  130.81,19.56 90 top
J14  [JST04_1MM_RA]  115.57,19.56 270 top
J15  [1X05_NO_SILK]  118.11,8.13 0 top
J16  [JST04_1MM_RA]  27.18,45.47 90 top
J17  [JST04_1MM_RA]  11.94,45.47 270 top
J18  [1X05_NO_SILK]  14.48,34.04 0 top
J19  [JST04_1MM_RA]  53.09,45.47 90 top
J20  [JST04_1MM_RA]  37.85,45.47 270 top
J21  [1X05_NO_SILK]  40.39,34.04 0 top
J22  [JST04_1MM_RA]  78.99,45.47 90 top
J23  [JST04_1MM_RA]  63.75,45.47 270 top
J24  [1X05_NO_SILK]  66.29,34.04 0 top
J25  [JST04_1MM_RA]  104.9,45.47 90 top
J26  [JST04_1MM_RA]  89.66,45.47 270 top
J27  [1X05_NO_SILK]  92.2,34.04 0 top
J28  [JST04_1MM_RA]  130.81,45.47 90 top
J29  [JST04_1MM_RA]  115.57,45.47 270 top
J30  [1X05_NO_SILK]  118.11,34.04 0 top
J31  [JST04_1MM_RA]  27.18,71.37 90 top
J32  [JST04_1MM_RA]  11.94,71.37 270 top
J33  [1X05_NO_SILK]  14.48,59.94 0 top
J34  [JST04_1MM_RA]  53.09,71.37 90 top
J35  [JST04_1MM_RA]  37.85,71.37 270 top
J36  [1X05_NO_SILK]  40.39,59.94 0 top
J37  [JST04_1MM_RA]  78.99,71.37 90 top
J38  [JST04_1MM_RA]  63.75,71.37 270 top
J39  [1X05_NO_SILK]  66.29,59.94 0 top
J40  [JST04_1MM_RA]  104.9,71.37 90 top
J41  [JST04_1MM_RA]  89.66,71.37 270 top
J42  [1X05_NO_SILK]  92.2,59.94 0 top
J43  [JST04_1MM_RA]  130.81,71.37 90 top
J44  [JST04_1MM_RA]  115.57,71.37 270 top
J45  [1X05_NO_SILK]  118.11,59.94 0 top
J46  [JST04_1MM_RA]  27.18,97.28 90 top
J47  [JST04_1MM_RA]  11.94,97.28 270 top
J48  [1X05_NO_SILK]  14.48,85.85 0 top
J49  [JST04_1MM_RA]  53.09,97.28 90 top
J50  [JST04_1MM_RA]  37.85,97.28 270 top
J51  [1X05_NO_SILK]  40.39,85.85 0 top
J52  [JST04_1MM_RA]  78.99,97.28 90 top
J53  [JST04_1MM_RA]  63.75,97.28 270 top
J54  [1X05_NO_SILK]  66.29,85.85 0 top
J55  [JST04_1MM_RA]  104.9,97.28 90 top
J56  [JST04_1MM_RA]  89.66,97.28 270 top
J57  [1X05_NO_SILK]  92.2,85.85 0 top
J58  [JST04_1MM_RA]  130.81,97.28 90 top
J59  [JST04_1MM_RA]  115.57,97.28 270 top
J60  [1X05_NO_SILK]  118.11,85.85 0 top
J61  [JST04_1MM_RA]  27.18,123.19 90 top
J62  [JST04_1MM_RA]  11.94,123.19 270 top
J63  [1X05_NO_SILK]  14.48,111.76 0 top
J64  [JST04_1MM_RA]  53.09,123.19 90 top
J65  [JST04_1MM_RA]  37.85,123.19 270 top
J66  [1X05_NO_SILK]  40.39,111.76 0 top
J67  [JST04_1MM_RA]  78.99,123.19 90 top
J68  [JST04_1MM_RA]  63.75,123.19 270 top
J69  [1X05_NO_SILK]  66.29,111.76 0 top
J70  [JST04_1MM_RA]  104.9,123.19 90 top
J71  [JST04_1MM_RA]  89.66,123.19 270 top
J72  [1X05_NO_SILK]  92.2,111.76 0 top
J73  [JST04_1MM_RA]  130.81,123.19 90 top
J74  [JST04_1MM_RA]  115.57,123.19 270 top
J75  [1X05_NO_SILK]  118.11,111.76 0 top
J76  [JST04_1MM_RA]  27.18,149.1 90 top
J77  [JST04_1MM_RA]  11.94,149.1 270 top
J78  [1X05_NO_SILK]  14.48,137.67 0 top
J79  [JST04_1MM_RA]  53.09,149.1 90 top
J80  [JST04_1MM_RA]  37.85,149.1 270 top
J81  [1X05_NO_SILK]  40.39,137.67 0 top
J82  [JST04_1MM_RA]  78.99,149.1 90 top
J83  [JST04_1MM_RA]  63.75,149.1 270 top
J84  [1X05_NO_SILK]  66.29,137.67 0 top
J85  [JST04_1MM_RA]  104.9,149.1 90 top
J86  [JST04_1MM_RA]  89.66,149.1 270 top
J87  [1X05_NO_SILK]  92.2,137.67 0 top
J88  [JST04_1MM_RA]  130.81,149.1 90 top
J89  [JST04_1MM_RA]  115.57,149.1 270 top
J90  [1X05_NO_SILK]  118.11,137.67 0 top
J91  [JST04_1MM_RA]  27.18,175.01 90 top
J92  [JST04_1MM_RA]  11.94,175.01 270 top
J93  [1X05_NO_SILK]  14.48,163.58 0 top
J94  [JST04_1MM_RA]  53.09,175.01 90 top
J95  [JST04_1MM_RA]  37.85,175.01 270 top
J96  [1X05_NO_SILK]  40.39,163.58 0 top
J97  [JST04_1MM_RA]  78.99,175.01 90 top
J98  [JST04_1MM_RA]  63.75,175.01 270 top
J99  [1X05_NO_SILK]  66.29,163.58 0 top
J100  [JST04_1MM_RA]  104.9,175.01 90 top
J101  [JST04_1MM_RA]  89.66,175.01 270 top
J102  [1X05_NO_SILK]  92.2,163.58 0 top
J103  [JST04_1MM_RA]  130.81,175.01 90 top
J104  [JST04_1MM_RA]  115.57,175.01 270 top
J105  [1X05_NO_SILK]  118.11,163.58 0 top
JP1  LED  [SMT-JUMPER_2_NC_TRACE_SILK]  9.4,23.37 0 bottom
JP2  ADDR  [SMT-JUMPER_2_NO_SILK]  13.97,14.86 0 bottom
JP3  I2C_PU  [SMT-JUMPER_3_2-NC_TRACE_SILK]  19.81,14.86 0 bottom
JP4  LED  [SMT-JUMPER_2_NC_TRACE_SILK]  35.31,23.37 0 bottom
JP5  ADDR  [SMT-JUMPER_2_NO_SILK]  39.88,14.86 0 bottom
JP6  I2C_PU  [SMT-JUMPER_3_2-NC_TRACE_SILK]  45.72,14.86 0 bottom
JP7  LED  [SMT-JUMPER_2_NC_TRACE_SILK]  61.21,23.37 0 bottom
JP8  ADDR  [SMT-JUMPER_2_NO_SILK]  65.79,14.86 0 bottom
JP9  I2C_PU  [SMT-JUMPER_3_2-NC_TRACE_SILK]  71.63,14.86 0 bottom
JP10  LED  [SMT-JUMPER_2_NC_TRACE_SILK]  87.12,23.37 0 bottom
JP11  ADDR  [SMT-JUMPER_2_NO_SILK]  91.69,14.86 0 bottom
JP12  I2C_PU  [SMT-JUMPER_3_2-NC_TRACE_SILK]  97.54,14.86 0 bottom
JP13  LED  [SMT-JUMPER_2_NC_TRACE_SILK]  113.03,23.37 0 bottom
JP14  ADDR  [SMT-JUMPER_2_NO_SILK]  117.6,14.86 0 bottom
JP15  I2C_PU  [SMT-JUMPER_3_2-NC_TRACE_SILK]  123.44,14.86 0 bottom
JP16  LED  [SMT-JUMPER_2_NC_TRACE_SILK]  9.4,49.28 0 bottom
JP17  ADDR  [SMT-JUMPER_2_NO_SILK]  13.97,40.77 0 bottom
JP18  I2C_PU  [SMT-JUMPER_3_2-NC_TRACE_SILK]  19.81,40.77 0 bottom
JP19  LED  [SMT-JUMPER_2_NC_TRACE_SILK]  35.31,49.28 0 bottom
JP20  ADDR  [SMT-JUMPER_2_NO_SILK]  39.88,40.77 0 bottom
JP21  I2C_PU  [SMT-JUMPER_3_2-NC_TRACE_SILK]  45.72,40.77 0 bottom
JP22  LED  [SMT-JUMPER_2_NC_TRACE_SILK]  61.21,49.28 0 bottom
JP23  ADDR  [SMT-JUMPER_2_NO_SILK]  65.79,40.77 0 bottom
JP24  I2C_PU  [SMT-JUMPER_3_2-NC_TRACE_SILK]  71.63,40.77 0 bottom
JP25  LED  [SMT-JUMPER_2_NC_TRACE_SILK]  87.12,49.28 0 bottom
JP26  ADDR  [SMT-JUMPER_2_NO_SILK]  91.69,40.77 0 bottom
JP27  I2C_PU  [SMT-JUMPER_3_2-NC_TRACE_SILK]  97.54,40.77 0 bottom
JP28  LED  [SMT-JUMPER_2_NC_TRACE_SILK]  113.03,49.28 0 bottom
JP29  ADDR  [SMT-JUMPER_2_NO_SILK]  117.6,40.77 0 bottom
JP30  I2C_PU  [SMT-JUMPER_3_2-NC_TRACE_SILK]  123.44,40.77 0 bottom
JP31  LED  [SMT-JUMPER_2_NC_TRACE_SILK]  9.4,75.18 0 bottom
JP32  ADDR  [SMT-JUMPER_2_NO_SILK]  13.97,66.67 0 bottom
JP33  I2C_PU  [SMT-JUMPER_3_2-NC_TRACE_SILK]  19.81,66.67 0 bottom
JP34  LED  [SMT-JUMPER_2_NC_TRACE_SILK]  35.31,75.18 0 bottom
JP35  ADDR  [SMT-JUMPER_2_NO_SILK]  39.88,66.67 0 bottom
JP36  I2C_PU  [SMT-JUMPER_3_2-NC_TRACE_SILK]  45.72,66.67 0 bottom
JP37  LED  [SMT-JUMPER_2_NC_TRACE_SILK]  61.21,75.18 0 bottom
JP38  ADDR  [SMT-JUMPER_2_NO_SILK]  65.79,66.67 0 bottom
JP39  I2C_PU  [SMT-JUMPER_3_2-NC_TRACE_SILK]  71.63,66.67 0 bottom
JP40  LED  [SMT-JUMPER_2_NC_TRACE_SILK]  87.12,75.18 0 bottom
JP41  ADDR  [SMT-JUMPER_2_NO_SILK]  91.69,66.67 0 bottom
JP42  I2C_PU  [SMT-JUMPER_3_2-NC_TRACE_SILK]  97.54,66.67 0 bottom
JP43  LED  [SMT-JUMPER_2_NC_TRACE_SILK]  113.03,75.18 0 bottom
JP44  ADDR  [SMT-JUMPER_2_NO_SILK]  117.6,66.67 0 bottom
JP45  I2C_PU  [SMT-JUMPER_3_2-NC_TRACE_SILK]  123.44,66.67 0 bottom
JP46  LED  [SMT-JUMPER_2_NC_TRACE_SILK]  9.4,101.09 0 bottom
JP47  ADDR  [SMT-JUMPER_2_NO_SILK]  13.97,92.58 0 bottom
JP48  I2C_PU  [SMT-JUMPER_3_2-NC_TRACE_SILK]  19.81,92.58 0 bottom
JP49  LED  [SMT-JUMPER_2_NC_TRACE_SILK]  35.31,101.09 0 bottom
JP50  ADDR  [SMT-JUMPER_2_NO_SILK]  39.88,92.58 0 bottom
JP51  I2C_PU  [SMT-JUMPER_3_2-NC_TRACE_SILK]  45.72,92.58 0 bottom
JP52  LED  [SMT-JUMPER_2_NC_TRACE_SILK]  61.21,101.09 0 bottom
JP53  ADDR  [SMT-JUMPER_2_NO_SILK]  65.79,92.58 0 bottom
JP54  I2C_PU  [SMT-JUMPER_3_2-NC_TRACE_SILK]  71.63,92.58 0 bottom
JP55  LED  [SMT-JUMPER_2_NC_TRACE_SILK]  87.12,101.09 0 bottom
JP56  ADDR  [SMT-JUMPER_2_NO_SILK]  91.69,92.58 0 bottom
JP57  I2C_PU  [SMT-JUMPER_3_2-NC_TRACE_SILK]  97.54,92.58 0 bottom
JP58  LED  [SMT-JUMPER_2_NC_TRACE_SILK]  113.03,101.09 0 bottom
JP59  ADDR  [SMT-JUMPER_2_NO_SILK]  117.6,92.58 0 bottom
JP60  I2C_PU  [SMT-JUMPER_3_2-NC_TRACE_SILK]  123.44,92.58 0 bottom
JP61  LED  [SMT-JUMPER_2_NC_TRACE_SILK]  9.4,127 0 bottom
JP62  ADDR  [SMT-JUMPER_2_NO_SILK]  13.97,118.49 0 bottom
JP63  I2C_PU  [SMT-JUMPER_3_2-NC_TRACE_SILK]  19.81,118.49 0 bottom
JP64  LED  [SMT-JUMPER_2_NC_TRACE_SILK]  35.31,127 0 bottom
JP65  ADDR  [SMT-JUMPER_2_NO_SILK]  39.88,118.49 0 bottom
JP66  I2C_PU  [SMT-JUMPER_3_2-NC_TRACE_SILK]  45.72,118.49 0 bottom
JP67  LED  [SMT-JUMPER_2_NC_TRACE_SILK]  61.21,127 0 bottom
JP68  ADDR  [SMT-JUMPER_2_NO_SILK]  65.79,118.49 0 bottom
JP69  I2C_PU  [SMT-JUMPER_3_2-NC_TRACE_SILK]  71.63,118.49 0 bottom
JP70  LED  [SMT-JUMPER_2_NC_TRACE_SILK]  87.12,127 0 bottom
JP71  ADDR  [SMT-JUMPER_2_NO_SILK]  91.69,118.49 0 bottom
JP72  I2C_PU  [SMT-JUMPER_3_2-NC_TRACE_SILK]  97.54,118.49 0 bottom
JP73  LED  [SMT-JUMPER_2_NC_TRACE_SILK]  113.03,127 0 bottom
JP74  ADDR  [SMT-JUMPER_2_NO_SILK]  117.6,118.49 0 bottom
JP75  I2C_PU  [SMT-JUMPER_3_2-NC_TRACE_SILK]  123.44,118.49 0 bottom
JP76  LED  [SMT-JUMPER_2_NC_TRACE_SILK]  9.4,152.91 0 bottom
JP77  ADDR  [SMT-JUMPER_2_NO_SILK]  13.97,144.4 0 bottom
JP78  I2C_PU  [SMT-JUMPER_3_2-NC_TRACE_SILK]  19.81,144.4 0 bottom
JP79  LED  [SMT-JUMPER_2_NC_TRACE_SILK]  35.31,152.91 0 bottom
JP80  ADDR  [SMT-JUMPER_2_NO_SILK]  39.88,144.4 0 bottom
JP81  I2C_PU  [SMT-JUMPER_3_2-NC_TRACE_SILK]  45.72,144.4 0 bottom
JP82  LED  [SMT-JUMPER_2_NC_TRACE_SILK]  61.21,152.91 0 bottom
JP83  ADDR  [SMT-JUMPER_2_NO_SILK]  65.79,144.4 0 bottom
JP84  I2C_PU  [SMT-JUMPER_3_2-NC_TRACE_SILK]  71.63,144.4 0 bottom
JP85  LED  [SMT-JUMPER_2_NC_TRACE_SILK]  87.12,152.91 0 bottom
JP86  ADDR  [SMT-JUMPER_2_NO_SILK]  91.69,144.4 0 bottom
JP87  I2C_PU  [SMT-JUMPER_3_2-NC_TRACE_SILK]  97.54,144.4 0 bottom
JP88  LED  [SMT-JUMPER_2_NC_TRACE_SILK]  113.03,152.91 0 bottom
JP89  ADDR  [SMT-JUMPER_2_NO_SILK]  117.6,144.4 0 bottom
JP90  I2C_PU  [SMT-JUMPER_3_2-NC_TRACE_SILK]  123.44,144.4 0 bottom
JP91  LED  [SMT-JUMPER_2_NC_TRACE_SILK]  9.4,178.82 0 bottom
JP92  ADDR  [SMT-JUMPER_2_NO_SILK]  13.97,170.31 0 bottom
JP93  I2C_PU  [SMT-JUMPER_3_2-NC_TRACE_SILK]  19.81,170.31 0 bottom
JP94  LED  [SMT-JUMPER_2_NC_TRACE_SILK]  35.31,178.82 0 bottom
JP95  ADDR  [SMT-JUMPER_2_NO_SILK]  39.88,170.31 0 bottom
JP96  I2C_PU  [SMT-JUMPER_3_2-NC_TRACE_SILK]  45.72,170.31 0 bottom
JP97  LED  [SMT-JUMPER_2_NC_TRACE_SILK]  61.21,178.82 0 bottom
JP98  ADDR  [SMT-JUMPER_2_NO_SILK]  65.79,170.31 0 bottom
JP99  I2C_PU  [SMT-JUMPER_3_2-NC_TRACE_SILK]  71.63,170.31 0 bottom
JP100  LED  [SMT-JUMPER_2_NC_TRACE_SILK]  87.12,178.82 0 bottom
JP101  ADDR  [SMT-JUMPER_2_NO_SILK]  91.69,170.31 0 bottom
JP102  I2C_PU  [SMT-JUMPER_3_2-NC_TRACE_SILK]  97.54,170.31 0 bottom
JP103  LED  [SMT-JUMPER_2_NC_TRACE_SILK]  113.03,178.82 0 bottom
JP104  ADDR  [SMT-JUMPER_2_NO_SILK]  117.6,170.31 0 bottom
JP105  I2C_PU  [SMT-JUMPER_3_2-NC_TRACE_SILK]  123.44,170.31 0 bottom
LOGO1  SFE_LOGO_NAME_FLAME.1_INCH  [SFE_LOGO_NAME_FLAME_.1]  19.3,27.18 0 bottom
LOGO2  OSHW-LOGOS  [OSHW-LOGO-S]  29.97,25.4 0 bottom
LOGO3  SFE_LOGO_NAME_FLAME.1_INCH  [SFE_LOGO_NAME_FLAME_.1]  45.21,27.18 0 bottom
LOGO4  OSHW-LOGOS  [OSHW-LOGO-S]  55.88,25.4 0 bottom
LOGO5  SFE_LOGO_NAME_FLAME.1_INCH  [SFE_LOGO_NAME_FLAME_.1]  71.12,27.18 0 bottom
LOGO6  OSHW-LOGOS  [OSHW-LOGO-S]  81.79,25.4 0 bottom
LOGO7  SFE_LOGO_NAME_FLAME.1_INCH  [SFE_LOGO_NAME_FLAME_.1]  97.03,27.18 0 bottom
LOGO8  OSHW-LOGOS  [OSHW-LOGO-S]  107.7,25.4 0 bottom
LOGO9  SFE_LOGO_NAME_FLAME.1_INCH  [SFE_LOGO_NAME_FLAME_.1]  122.94,27.18 0 bottom
LOGO10  OSHW-LOGOS  [OSHW-LOGO-S]  133.6,25.4 0 bottom
LOGO11  SFE_LOGO_NAME_FLAME.1_INCH  [SFE_LOGO_NAME_FLAME_.1]  19.3,53.09 0 bottom
LOGO12  OSHW-LOGOS  [OSHW-LOGO-S]  29.97,51.31 0 bottom
LOGO13  SFE_LOGO_NAME_FLAME.1_INCH  [SFE_LOGO_NAME_FLAME_.1]  45.21,53.09 0 bottom
LOGO14  OSHW-LOGOS  [OSHW-LOGO-S]  55.88,51.31 0 bottom
LOGO15  SFE_LOGO_NAME_FLAME.1_INCH  [SFE_LOGO_NAME_FLAME_.1]  71.12,53.09 0 bottom
LOGO16  OSHW-LOGOS  [OSHW-LOGO-S]  81.79,51.31 0 bottom
LOGO17  SFE_LOGO_NAME_FLAME.1_INCH  [SFE_LOGO_NAME_FLAME_.1]  97.03,53.09 0 bottom
LOGO18  OSHW-LOGOS  [OSHW-LOGO-S]  107.7,51.31 0 bottom
LOGO19  SFE_LOGO_NAME_FLAME.1_INCH  [SFE_LOGO_NAME_FLAME_.1]  122.94,53.09 0 bottom
LOGO20  OSHW-LOGOS  [OSHW-LOGO-S]  133.6,51.31 0 bottom
LOGO21  SFE_LOGO_NAME_FLAME.1_INCH  [SFE_LOGO_NAME_FLAME_.1]  19.3,78.99 0 bottom
LOGO22  OSHW-LOGOS  [OSHW-LOGO-S]  29.97,77.22 0 bottom
LOGO23  SFE_LOGO_NAME_FLAME.1_INCH  [SFE_LOGO_NAME_FLAME_.1]  45.21,78.99 0 bottom
LOGO24  OSHW-LOGOS  [OSHW-LOGO-S]  55.88,77.22 0 bottom
LOGO25  SFE_LOGO_NAME_FLAME.1_INCH  [SFE_LOGO_NAME_FLAME_.1]  71.12,78.99 0 bottom
LOGO26  OSHW-LOGOS  [OSHW-LOGO-S]  81.79,77.22 0 bottom
LOGO27  SFE_LOGO_NAME_FLAME.1_INCH  [SFE_LOGO_NAME_FLAME_.1]  97.03,78.99 0 bottom
LOGO28  OSHW-LOGOS  [OSHW-LOGO-S]  107.7,77.22 0 bottom
LOGO29  SFE_LOGO_NAME_FLAME.1_INCH  [SFE_LOGO_NAME_FLAME_.1]  122.94,78.99 0 bottom
LOGO30  OSHW-LOGOS  [OSHW-LOGO-S]  133.6,77.22 0 bottom
LOGO31  SFE_LOGO_NAME_FLAME.1_INCH  [SFE_LOGO_NAME_FLAME_.1]  19.3,104.9 0 bottom
LOGO32  OSHW-LOGOS  [OSHW-LOGO-S]  29.97,103.12 0 bottom
LOGO33  SFE_LOGO_NAME_FLAME.1_INCH  [SFE_LOGO_NAME_FLAME_.1]  45.21,104.9 0 bottom
LOGO34  OSHW-LOGOS  [OSHW-LOGO-S]  55.88,103.12 0 bottom
LOGO35  SFE_LOGO_NAME_FLAME.1_INCH  [SFE_LOGO_NAME_FLAME_.1]  71.12,104.9 0 bottom
LOGO36  OSHW-LOGOS  [OSHW-LOGO-S]  81.79,103.12 0 bottom
LOGO37  SFE_LOGO_NAME_FLAME.1_INCH  [SFE_LOGO_NAME_FLAME_.1]  97.03,104.9 0 bottom
LOGO38  OSHW-LOGOS  [OSHW-LOGO-S]  107.7,103.12 0 bottom
LOGO39  SFE_LOGO_NAME_FLAME.1_INCH  [SFE_LOGO_NAME_FLAME_.1]  122.94,104.9 0 bottom
LOGO40  OSHW-LOGOS  [OSHW-LOGO-S]  133.6,103.12 0 bottom
LOGO41  SFE_LOGO_NAME_FLAME.1_INCH  [SFE_LOGO_NAME_FLAME_.1]  19.3,130.81 0 bottom
LOGO42  OSHW-LOGOS  [OSHW-LOGO-S]  29.97,129.03 0 bottom
LOGO43  SFE_LOGO_NAME_FLAME.1_INCH  [SFE_LOGO_NAME_FLAME_.1]  45.21,130.81 0 bottom
LOGO44  OSHW-LOGOS  [OSHW-LOGO-S]  55.88,129.03 0 bottom
LOGO45  SFE_LOGO_NAME_FLAME.1_INCH  [SFE_LOGO_NAME_FLAME_.1]  71.12,130.81 0 bottom
LOGO46  OSHW-LOGOS  [OSHW-LOGO-S]  81.79,129.03 0 bottom
LOGO47  SFE_LOGO_NAME_FLAME.1_INCH  [SFE_LOGO_NAME_FLAME_.1]  97.03,130.81 0 bottom
LOGO48  OSHW-LOGOS  [OSHW-LOGO-S]  107.7,129.03 0 bottom
LOGO49  SFE_LOGO_NAME_FLAME.1_INCH  [SFE_LOGO_NAME_FLAME_.1]  122.94,130.81 0 bottom
LOGO50  OSHW-LOGOS  [OSHW-LOGO-S]  133.6,129.03 0 bottom
LOGO51  SFE_LOGO_NAME_FLAME.1_INCH  [SFE_LOGO_NAME_FLAME_.1]  19.3,156.72 0 bottom
LOGO52  OSHW-LOGOS  [OSHW-LOGO-S]  29.97,154.94 0 bottom
LOGO53  SFE_LOGO_NAME_FLAME.1_INCH  [SFE_LOGO_NAME_FLAME_.1]  45.21,156.72 0 bottom
LOGO54  OSHW-LOGOS  [OSHW-LOGO-S]  55.88,154.94 0 bottom
LOGO55  SFE_LOGO_NAME_FLAME.1_INCH  [SFE_LOGO_NAME_FLAME_.1]  71.12,156.72 0 bottom
LOGO56  OSHW-LOGOS  [OSHW-LOGO-S]  81.79,154.94 0 bottom
LOGO57  SFE_LOGO_NAME_FLAME.1_INCH  [SFE_LOGO_NAME_FLAME_.1]  97.03,156.72 0 bottom
LOGO58  OSHW-LOGOS  [OSHW-LOGO-S]  107.7,154.94 0 bottom
LOGO59  SFE_LOGO_NAME_FLAME.1_INCH  [SFE_LOGO_NAME_FLAME_.1]  122.94,156.72 0 bottom
LOGO60  OSHW-LOGOS  [OSHW-LOGO-S]  133.6,154.94 0 bottom
LOGO61  SFE_LOGO_NAME_FLAME.1_INCH  [SFE_LOGO_NAME_FLAME_.1]  19.3,182.63 0 bottom
LOGO62  OSHW-LOGOS  [OSHW-LOGO-S]  29.97,180.85 0 bottom
LOGO63  SFE_LOGO_NAME_FLAME.1_INCH  [SFE_LOGO_NAME_FLAME_.1]  45.21,182.63 0 bottom
LOGO64  OSHW-LOGOS  [OSHW-LOGO-S]  55.88,180.85 0 bottom
LOGO65  SFE_LOGO_NAME_FLAME.1_INCH  [SFE_LOGO_NAME_FLAME_.1]  71.12,182.63 0 bottom
LOGO66  OSHW-LOGOS  [OSHW-LOGO-S]  81.79,180.85 0 bottom
LOGO67  SFE_LOGO_NAME_FLAME.1_INCH  [SFE_LOGO_NAME_FLAME_.1]  97.03,182.63 0 bottom
LOGO68  OSHW-LOGOS  [OSHW-LOGO-S]  107.7,180.85 0 bottom
LOGO69  SFE_LOGO_NAME_FLAME.1_INCH  [SFE_LOGO_NAME_FLAME_.1]  122.94,182.63 0 bottom
LOGO70  OSHW-LOGOS  [OSHW-LOGO-S]  133.6,180.85 0 bottom
R1  4.7k  [0603]  18.29,14.48 90 top
R2  4.7k  [0603]  21.21,14.48 270 top
R3  10k  [0603]  15.75,14.48 270 top
R4  1k  [0603]  9.45,23.88 0 top
R5  10k  [0603]  20.62,22.66 0 top
R6  4.7k  [0603]  44.2,14.48 90 top
R7  4.7k  [0603]  47.12,14.48 270 top
R8  10k  [0603]  41.66,14.48 270 top
R9  1k  [0603]  35.36,23.88 0 top
R10  10k  [0603]  46.53,22.66 0 top
R11  4.7k  [0603]  70.1,14.48 90 top
R12  4.7k  [0603]  73.03,14.48 270 top
R13  10k  [0603]  67.56,14.48 270 top
R14  1k  [0603]  61.26,23.88 0 top
R15  10k  [0603]  72.44,22.66 0 top
R16  4.7k  [0603]  96.01,14.48 90 top
R17  4.7k  [0603]  98.93,14.48 270 top
R18  10k  [0603]  93.47,14.48 270 top
R19  1k  [0603]  87.17,23.88 0 top
R20  10k  [0603]  98.35,22.66 0 top
R21  4.7k  [0603]  121.92,14.48 90 top
R22  4.7k  [0603]  124.84,14.48 270 top
R23  10k  [0603]  119.38,14.48 270 top
R24  1k  [0603]  113.08,23.88 0 top
R25  10k  [0603]  124.26,22.66 0 top
R26  4.7k  [0603]  18.29,40.39 90 top
R27  4.7k  [0603]  21.21,40.39 270 top
R28  10k  [0603]  15.75,40.39 270 top
R29  1k  [0603]  9.45,49.78 0 top
R30  10k  [0603]  20.62,48.56 0 top
R31  4.7k  [0603]  44.2,40.39 90 top
R32  4.7k  [0603]  47.12,40.39 270 top
R33  10k  [0603]  41.66,40.39 270 top
R34  1k  [0603]  35.36,49.78 0 top
R35  10k  [0603]  46.53,48.56 0 top
R36  4.7k  [0603]  70.1,40.39 90 top
R37  4.7k  [0603]  73.03,40.39 270 top
R38  10k  [0603]  67.56,40.39 270 top
R39  1k  [0603]  61.26,49.78 0 top
R40  10k  [0603]  72.44,48.56 0 top
R41  4.7k  [0603]  96.01,40.39 90 top
R42  4.7k  [0603]  98.93,40.39 270 top
R43  10k  [0603]  93.47,40.39 270 top
R44  1k  [0603]  87.17,49.78 0 top
R45  10k  [0603]  98.35,48.56 0 top
R46  4.7k  [0603]  121.92,40.39 90 top
R47  4.7k  [0603]  124.84,40.39 270 top
R48  10k  [0603]  119.38,40.39 270 top
R49  1k  [0603]  113.08,49.78 0 top
R50  10k  [0603]  124.26,48.56 0 top
R51  4.7k  [0603]  18.29,66.29 90 top
R52  4.7k  [0603]  21.21,66.29 270 top
R53  10k  [0603]  15.75,66.29 270 top
R54  1k  [0603]  9.45,75.69 0 top
R55  10k  [0603]  20.62,74.47 0 top
R56  4.7k  [0603]  44.2,66.29 90 top
R57  4.7k  [0603]  47.12,66.29 270 top
R58  10k  [0603]  41.66,66.29 270 top
R59  1k  [0603]  35.36,75.69 0 top
R60  10k  [0603]  46.53,74.47 0 top
R61  4.7k  [0603]  70.1,66.29 90 top
R62  4.7k  [0603]  73.03,66.29 270 top
R63  10k  [0603]  67.56,66.29 270 top
R64  1k  [0603]  61.26,75.69 0 top
R65  10k  [0603]  72.44,74.47 0 top
R66  4.7k  [0603]  96.01,66.29 90 top
R67  4.7k  [0603]  98.93,66.29 270 top
R68  10k  [0603]  93.47,66.29 270 top
R69  1k  [0603]  87.17,75.69 0 top
R70  10k  [0603]  98.35,74.47 0 top
R71  4.7k  [0603]  121.92,66.29 90 top
R72  4.7k  [0603]  124.84,66.29 270 top
R73  10k  [0603]  119.38,66.29 270 top
R74  1k  [0603]  113.08,75.69 0 top
R75  10k  [0603]  124.26,74.47 0 top
R76  4.7k  [0603]  18.29,92.2 90 top
R77  4.7k  [0603]  21.21,92.2 270 top
R78  10k  [0603]  15.75,92.2 270 top
R79  1k  [0603]  9.45,101.6 0 top
R80  10k  [0603]  20.62,100.38 0 top
R81  4.7k  [0603]  44.2,92.2 90 top
R82  4.7k  [0603]  47.12,92.2 270 top
R83  10k  [0603]  41.66,92.2 270 top
R84  1k  [0603]  35.36,101.6 0 top
R85  10k  [0603]  46.53,100.38 0 top
R86  4.7k  [0603]  70.1,92.2 90 top
R87  4.7k  [0603]  73.03,92.2 270 top
R88  10k  [0603]  67.56,92.2 270 top
R89  1k  [0603]  61.26,101.6 0 top
R90  10k  [0603]  72.44,100.38 0 top
R91  4.7k  [0603]  96.01,92.2 90 top
R92  4.7k  [0603]  98.93,92.2 270 top
R93  10k  [0603]  93.47,92.2 270 top
R94  1k  [0603]  87.17,101.6 0 top
R95  10k  [0603]  98.35,100.38 0 top
R96  4.7k  [0603]  121.92,92.2 90 top
R97  4.7k  [0603]  124.84,92.2 270 top
R98  10k  [0603]  119.38,92.2 270 top
R99  1k  [0603]  113.08,101.6 0 top
R100  10k  [0603]  124.26,100.38 0 top
R101  4.7k  [0603]  18.29,118.11 90 top
R102  4.7k  [0603]  21.21,118.11 270 top
R103  10k  [0603]  15.75,118.11 270 top
R104  1k  [0603]  9.45,127.51 0 top
R105  10k  [0603]  20.62,126.29 0 top
R106  4.7k  [0603]  44.2,118.11 90 top
R107  4.7k  [0603]  47.12,118.11 270 top
R108  10k  [0603]  41.66,118.11 270 top
R109  1k  [0603]  35.36,127.51 0 top
R110  10k  [0603]  46.53,126.29 0 top
R111  4.7k  [0603]  70.1,118.11 90 top
R112  4.7k  [0603]  73.03,118.11 270 top
R113  10k  [0603]  67.56,118.11 270 top
R114  1k  [0603]  61.26,127.51 0 top
R115  10k  [0603]  72.44,126.29 0 top
R116  4.7k  [0603]  96.01,118.11 90 top
R117  4.7k  [0603]  98.93,118.11 270 top
R118  10k  [0603]  93.47,118.11 270 top
R119  1k  [0603]  87.17,127.51 0 top
R120  10k  [0603]  98.35,126.29 0 top
R121  4.7k  [0603]  121.92,118.11 90 top
R122  4.7k  [0603]  124.84,118.11 270 top
R123  10k  [0603]  119.38,118.11 270 top
R124  1k  [0603]  113.08,127.51 0 top
R125  10k  [0603]  124.26,126.29 0 top
R126  4.7k  [0603]  18.29,144.02 90 top
R127  4.7k  [0603]  21.21,144.02 270 top
R128  10k  [0603]  15.75,144.02 270 top
R129  1k  [0603]  9.45,153.42 0 top
R130  10k  [0603]  20.62,152.2 0 top
R131  4.7k  [0603]  44.2,144.02 90 top
R132  4.7k  [0603]  47.12,144.02 270 top
R133  10k  [0603]  41.66,144.02 270 top
R134  1k  [0603]  35.36,153.42 0 top
R135  10k  [0603]  46.53,152.2 0 top
R136  4.7k  [0603]  70.1,144.02 90 top
R137  4.7k  [0603]  73.03,144.02 270 top
R138  10k  [0603]  67.56,144.02 270 top
R139  1k  [0603]  61.26,153.42 0 top
R140  10k  [0603]  72.44,152.2 0 top
R141  4.7k  [0603]  96.01,144.02 90 top
R142  4.7k  [0603]  98.93,144.02 270 top
R143  10k  [0603]  93.47,144.02 270 top
R144  1k  [0603]  87.17,153.42 0 top
R145  10k  [0603]  98.35,152.2 0 top
R146  4.7k  [0603]  121.92,144.02 90 top
R147  4.7k  [0603]  124.84,144.02 270 top
R148  10k  [0603]  119.38,144.02 270 top
R149  1k  [0603]  113.08,153.42 0 top
R150  10k  [0603]  124.26,152.2 0 top
R151  4.7k  [0603]  18.29,169.93 90 top
R152  4.7k  [0603]  21.21,169.93 270 top
R153  10k  [0603]  15.75,169.93 270 top
R154  1k  [0603]  9.45,179.32 0 top
R155  10k  [0603]  20.62,178.1 0 top
R156  4.7k  [0603]  44.2,169.93 90 top
R157  4.7k  [0603]  47.12,169.93 270 top
R158  10k  [0603]  41.66,169.93 270 top
R159  1k  [0603]  35.36,179.32 0 top
R160  10k  [0603]  46.53,178.1 0 top
R161  4.7k  [0603]  70.1,169.93 90 top
R162  4.7k  [0603]  73.03,169.93 270 top
R163  10k  [0603]  67.56,169.93 270 top
R164  1k  [0603]  61.26,179.32 0 top
R165  10k  [0603]  72.44,178.1 0 top
R166  4.7k  [0603]  96.01,169.93 90 top
R167  4.7k  [0603]  98.93,169.93 270 top
R168  10k  [0603]  93.47,169.93 270 top
R169  1k  [0603]  87.17,179.32 0 top
R170  10k  [0603]  98.35,178.1 0 top
R171  4.7k  [0603]  121.92,169.93 90 top
R172  4.7k  [0603]  124.84,169.93 270 top
R173  10k  [0603]  119.38,169.93 270 top
R174  1k  [0603]  113.08,179.32 0 top
R175  10k  [0603]  124.26,178.1 0 top
U1  VEML6030  [VEML6030]  19.56,19.56 270 top
U2  VEML6030  [VEML6030]  45.47,19.56 270 top
U3  VEML6030  [VEML6030]  71.37,19.56 270 top
U4  VEML6030  [VEML6030]  97.28,19.56 270 top
U5  VEML6030  [VEML6030]  123.19,19.56 270 top
U6  VEML6030  [VEML6030]  19.56,45.47 270 top
U7  VEML6030  [VEML6030]  45.47,45.47 270 top
U8  VEML6030  [VEML6030]  71.37,45.47 270 top
U9  VEML6030  [VEML6030]  97.28,45.47 270 top
U10  VEML6030  [VEML6030]  123.19,45.47 270 top
U11  VEML6030  [VEML6030]  19.56,71.37 270 top
U12  VEML6030  [VEML6030]  45.47,71.37 270 top
U13  VEML6030  [VEML6030]  71.37,71.37 270 top
U14  VEML6030  [VEML6030]  97.28,71.37 270 top
U15  VEML6030  [VEML6030]  123.19,71.37 270 top
U16  VEML6030  [VEML6030]  19.56,97.28 270 top
U17  VEML6030  [VEML6030]  45.47,97.28 270 top
U18  VEML6030  [VEML6030]  71.37,97.28 270 top
U19  VEML6030  [VEML6030]  97.28,97.28 270 top
U20  VEML6030  [VEML6030]  123.19,97.28 270 top
U21  VEML6030  [VEML6030]  19.56,123.19 270 top
U22  VEML6030  [VEML6030]  45.47,123.19 270 top
U23  VEML6030  [VEML6030]  71.37,123.19 270 top
U24  VEML6030  [VEML6030]  97.28,123.19 270 top
U25  VEML6030  [VEML6030]  123.19,123.19 270 top
U26  VEML6030  [VEML6030]  19.56,149.1 270 top
U27  VEML6030  [VEML6030]  45.47,149.1 270 top
U28  VEML6030  [VEML6030]  71.37,149.1 270 top
U29  VEML6030  [VEML6030]  97.28,149.1 270 top
U30  VEML6030  [VEML6030]  123.19,149.1 270 top
U31  VEML6030  [VEML6030]  19.56,175.01 270 top
U32  VEML6030  [VEML6030]  45.47,175.01 270 top
U33  VEML6030  [VEML6030]  71.37,175.01 270 top
U34  VEML6030  [VEML6030]  97.28,175.01 270 top
U35  VEML6030  [VEML6030]  123.19,175.01 270 top
U$1  QWIIC_LOGO_5MM  [QWIIC_5MM]  9.65,14.99 0 top
U$2  [3V3-04]  17.02,8.38 90 top
U$3  [GND-04]  14.48,8.38 90 top
U$4  [SDA-[)]  19.56,8.38 90 top
U$5  [SCL-[)]  22.1,8.38 90 top
U$6  [INT#-[<]  24.64,8.25 90 top
U$7  [INT#-[<]  24.64,8.25 90 bottom
U$8  [GND-04]  14.48,8.38 90 bottom
U$9  [SDA-[)]  19.56,8.38 90 bottom
U$10  [SCL-[)]  22.1,8.38 90 bottom
U$11  [3V3-04]  17.02,8.38 90 bottom
U$12  [I_SUPER2_C-()-04]  21.72,17.02 0 bottom
U$13  [ADR-()]  16.38,17.02 0 bottom
U$14  [LED0]  11.68,25.4 0 bottom
U$15  [AMBIENT_LIGHT0]  12.32,29.97 0 top
U$16  [SENSOR1]  15.49,28.45 0 top
U$17  [VEML60302]  13.59,26.54 0 top
U$18  [SFE_LOGO_FLAME_.1]  29.72,13.21 0 top
U$19  [PWR-()-04]  6.98,26.62 0 top
U$20  [CLOSED#2]  22.91,19.61 0 bottom
U$21  [OPEN#0]  22.86,21.34 0 bottom
U$22  [0X481]  16.66,21.13 0 bottom
U$23  QWIIC_LOGO_5MM  [QWIIC_5MM]  35.56,14.99 0 top
U$24  [0X103]  16.46,19.58 0 bottom
U$25  [ADR0]  22.86,22.86 0 bottom
U$26  [JUMPER1]  18.64,22.86 0 bottom
U$27  [3V3-04]  42.93,8.38 90 top
U$28  [GND-04]  40.39,8.38 90 top
U$29  [SDA-[)]  45.47,8.38 90 top
U$30  [SCL-[)]  48.01,8.38 90 top
U$31  [INT#-[<]  50.55,8.25 90 top
U$32  [INT#-[<]  50.55,8.25 90 bottom
U$33  [GND-04]  40.39,8.38 90 bottom
U$34  [SDA-[)]  45.47,8.38 90 bottom
U$35  [SCL-[)]  48.01,8.38 90 bottom
U$36  [3V3-04]  42.93,8.38 90 bottom
U$37  [I_SUPER2_C-()-04]  47.62,17.02 0 bottom
U$38  [ADR-()]  42.29,17.02 0 bottom
U$39  [LED0]  37.59,25.4 0 bottom
U$40  [AMBIENT_LIGHT0]  38.23,29.97 0 top
U$41  [SENSOR1]  41.4,28.45 0 top
U$42  [VEML60302]  39.5,26.54 0 top
U$43  [SFE_LOGO_FLAME_.1]  55.63,13.21 0 top
U$44  [PWR-()-04]  32.89,26.62 0 top
U$45  [0X481]  42.57,21.13 0 bottom
U$46  [0X103]  42.37,19.58 0 bottom
U$47  [ADR0]  48.77,22.86 0 bottom
U$48  [JUMPER1]  44.55,22.86 0 bottom
U$49  [CLOSED#2]  48.82,19.61 0 bottom
U$50  [OPEN#0]  48.77,21.34 0 bottom
U$51  QWIIC_LOGO_5MM  [QWIIC_5MM]  61.47,14.99 0 top
U$52  [3V3-04]  68.83,8.38 90 top
U$53  [GND-04]  66.29,8.38 90 top
U$54  [SDA-[)]  71.37,8.38 90 top
U$55  [SCL-[)]  73.91,8.38 90 top
U$56  [INT#-[<]  76.45,8.25 90 top
U$57  [INT#-[<]  76.45,8.25 90 bottom
U$58  [GND-04]  66.29,8.38 90 bottom
U$59  [SDA-[)]  71.37,8.38 90 bottom
U$60  [SCL-[)]  73.91,8.38 90 bottom
U$61  [3V3-04]  68.83,8.38 90 bottom
U$62  [I_SUPER2_C-()-04]  73.53,17.02 0 bottom
U$63  [ADR-()]  68.2,17.02 0 bottom
U$64  [LED0]  63.5,25.4 0 bottom
U$65  [AMBIENT_LIGHT0]  64.14,29.97 0 top
U$66  [SENSOR1]  67.31,28.45 0 top
U$67  [VEML60302]  65.41,26.54 0 top
U$68  [SFE_LOGO_FLAME_.1]  81.53,13.21 0 top
U$69  [PWR-()-04]  58.8,26.62 0 top
U$70  [0X481]  68.48,21.13 0 bottom
U$71  [0X103]  68.28,19.58 0 bottom
U$72  [ADR0]  74.68,22.86 0 bottom
U$73  [JUMPER1]  70.46,22.86 0 bottom
U$74  [CLOSED#2]  74.73,19.61 0 bottom
U$75  [OPEN#0]  74.68,21.34 0 bottom
U$76  QWIIC_LOGO_5MM  [QWIIC_5MM]  87.38,14.99 0 top
U$77  [3V3-04]  94.74,8.38 90 top
U$78  [GND-04]  92.2,8.38 90 top
U$79  [SDA-[)]  97.28,8.38 90 top
U$80  [SCL-[)]  99.82,8.38 90 top
U$81  [INT#-[<]  102.36,8.25 90 top
U$82  [INT#-[<]  102.36,8.25 90 bottom
U$83  [GND-04]  92.2,8.38 90 bottom
U$84  [SDA-[)]  97.28,8.38 90 bottom
U$85  [SCL-[)]  99.82,8.38 90 bottom
U$86  [3V3-04]  94.74,8.38 90 bottom
U$87  [I_SUPER2_C-()-04]  99.44,17.02 0 bottom
U$88  [ADR-()]  94.11,17.02 0 bottom
U$89  [LED0]  89.41,25.4 0 bottom
U$90  [AMBIENT_LIGHT0]  90.04,29.97 0 top
U$91  [SENSOR1]  93.22,28.45 0 top
U$92  [VEML60302]  91.31,26.54 0 top
U$93  [SFE_LOGO_FLAME_.1]  107.44,13.21 0 top
U$94  [PWR-()-04]  84.71,26.62 0 top
U$95  [0X481]  94.39,21.13 0 bottom
U$96  [0X103]  94.18,19.58 0 bottom
U$97  [ADR0]  100.58,22.86 0 bottom
U$98  [JUMPER1]  96.37,22.86 0 bottom
U$99  [CLOSED#2]  100.63,19.61 0 bottom
U$100  [OPEN#0]  100.58,21.34 0 bottom
U$101  QWIIC_LOGO_5MM  [QWIIC_5MM]  113.28,14.99 0 top
U$102  [3V3-04]  120.65,8.38 90 top
U$103  [GND-04]  118.11,8.38 90 top
U$104  [SDA-[)]  123.19,8.38 90 top
U$105  [SCL-[)]  125.73,8.38 90 top
U$106  [INT#-[<]  128.27,8.25 90 top
U$107  [INT#-[<]  128.27,8.25 90 bottom
U$108  [GND-04]  118.11,8.38 90 bottom
U$109  [SDA-[)]  123.19,8.38 90 bottom
U$110  [SCL-[)]  125.73,8.38 90 bottom
U$111  [3V3-04]  120.65,8.38 90 bottom
U$112  [I_SUPER2_C-()-04]  125.35,17.02 0 bottom
U$113  [ADR-()]  120.02,17.02 0 bottom
U$114  [LED0]  115.32,25.4 0 bottom
U$115  [AMBIENT_LIGHT0]  115.95,29.97 0 top
U$116  [SENSOR1]  119.13,28.45 0 top
U$117  [VEML60302]  117.22,26.54 0 top
U$118  [SFE_LOGO_FLAME_.1]  133.35,13.21 0 top
U$119  [PWR-()-04]  110.62,26.62 0 top
U$120  [0X481]  120.29,21.13 0 bottom
U$121  [0X103]  120.09,19.58 0 bottom
U$122  [ADR0]  126.49,22.86 0 bottom
U$123  [JUMPER1]  122.28,22.86 0 bottom
U$124  [CLOSED#2]  126.54,19.61 0 bottom
U$125  [OPEN#0]  126.49,21.34 0 bottom
U$126  QWIIC_LOGO_5MM  [QWIIC_5MM]  9.65,40.89 0 top
U$127  [3V3-04]  17.02,34.29 90 top
U$128  [GND-04]  14.48,34.29 90 top
U$129  [SDA-[)]  19.56,34.29 90 top
U$130  [SCL-[)]  22.1,34.29 90 top
U$131  [INT#-[<]  24.64,34.16 90 top
U$132  [INT#-[<]  24.64,34.16 90 bottom
U$133  [GND-04]  14.48,34.29 90 bottom
U$134  [SDA-[)]  19.56,34.29 90 bottom
U$135  [SCL-[)]  22.1,34.29 90 bottom
U$136  [3V3-04]  17.02,34.29 90 bottom
U$137  [I_SUPER2_C-()-04]  21.72,42.93 0 bottom
U$138  [ADR-()]  16.38,42.93 0 bottom
U$139  [LED0]  11.68,51.31 0 bottom
U$140  [AMBIENT_LIGHT0]  12.32,55.88 0 top
U$141  [SENSOR1]  15.49,54.36 0 top
U$142  [VEML60302]  13.59,52.45 0 top